# Altium PCB TimeHAT.PcbDoc (part 1 of 3)
Units mil, origin at the board's own origin, x right, y up, seen from the top; angles counter-clockwise.
Board outline 2559.54 x 2225.8 mil, 4 copper layers (L01-TOP, L02-GND, L03-GND, L04-BOT), stack 17.5 mil thick; 36 components, 124 nets, 365 pads, 394 vias.
Unrouted connection lines stored in the file: 194.
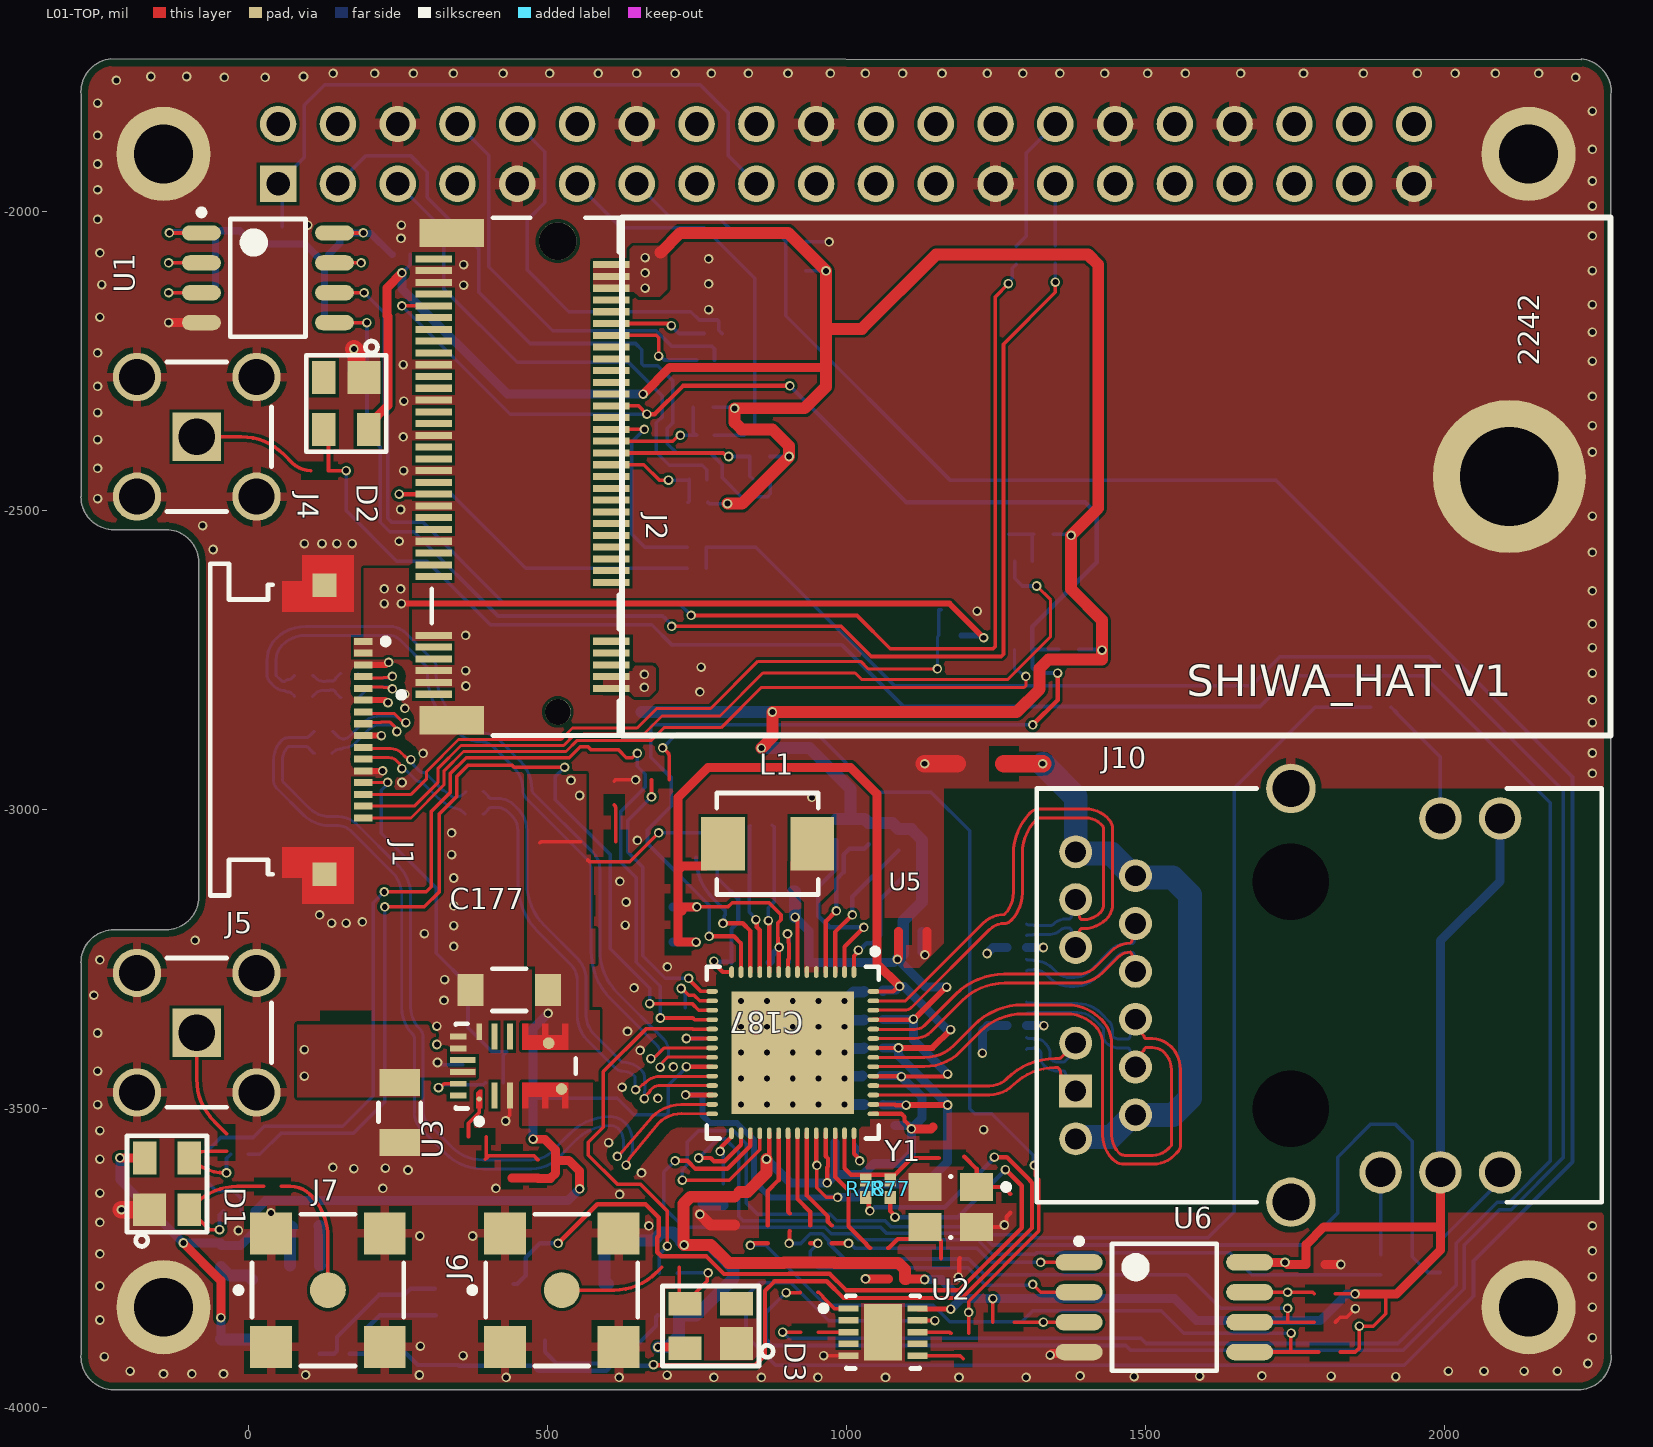
[diagram p0: L01-TOP view]
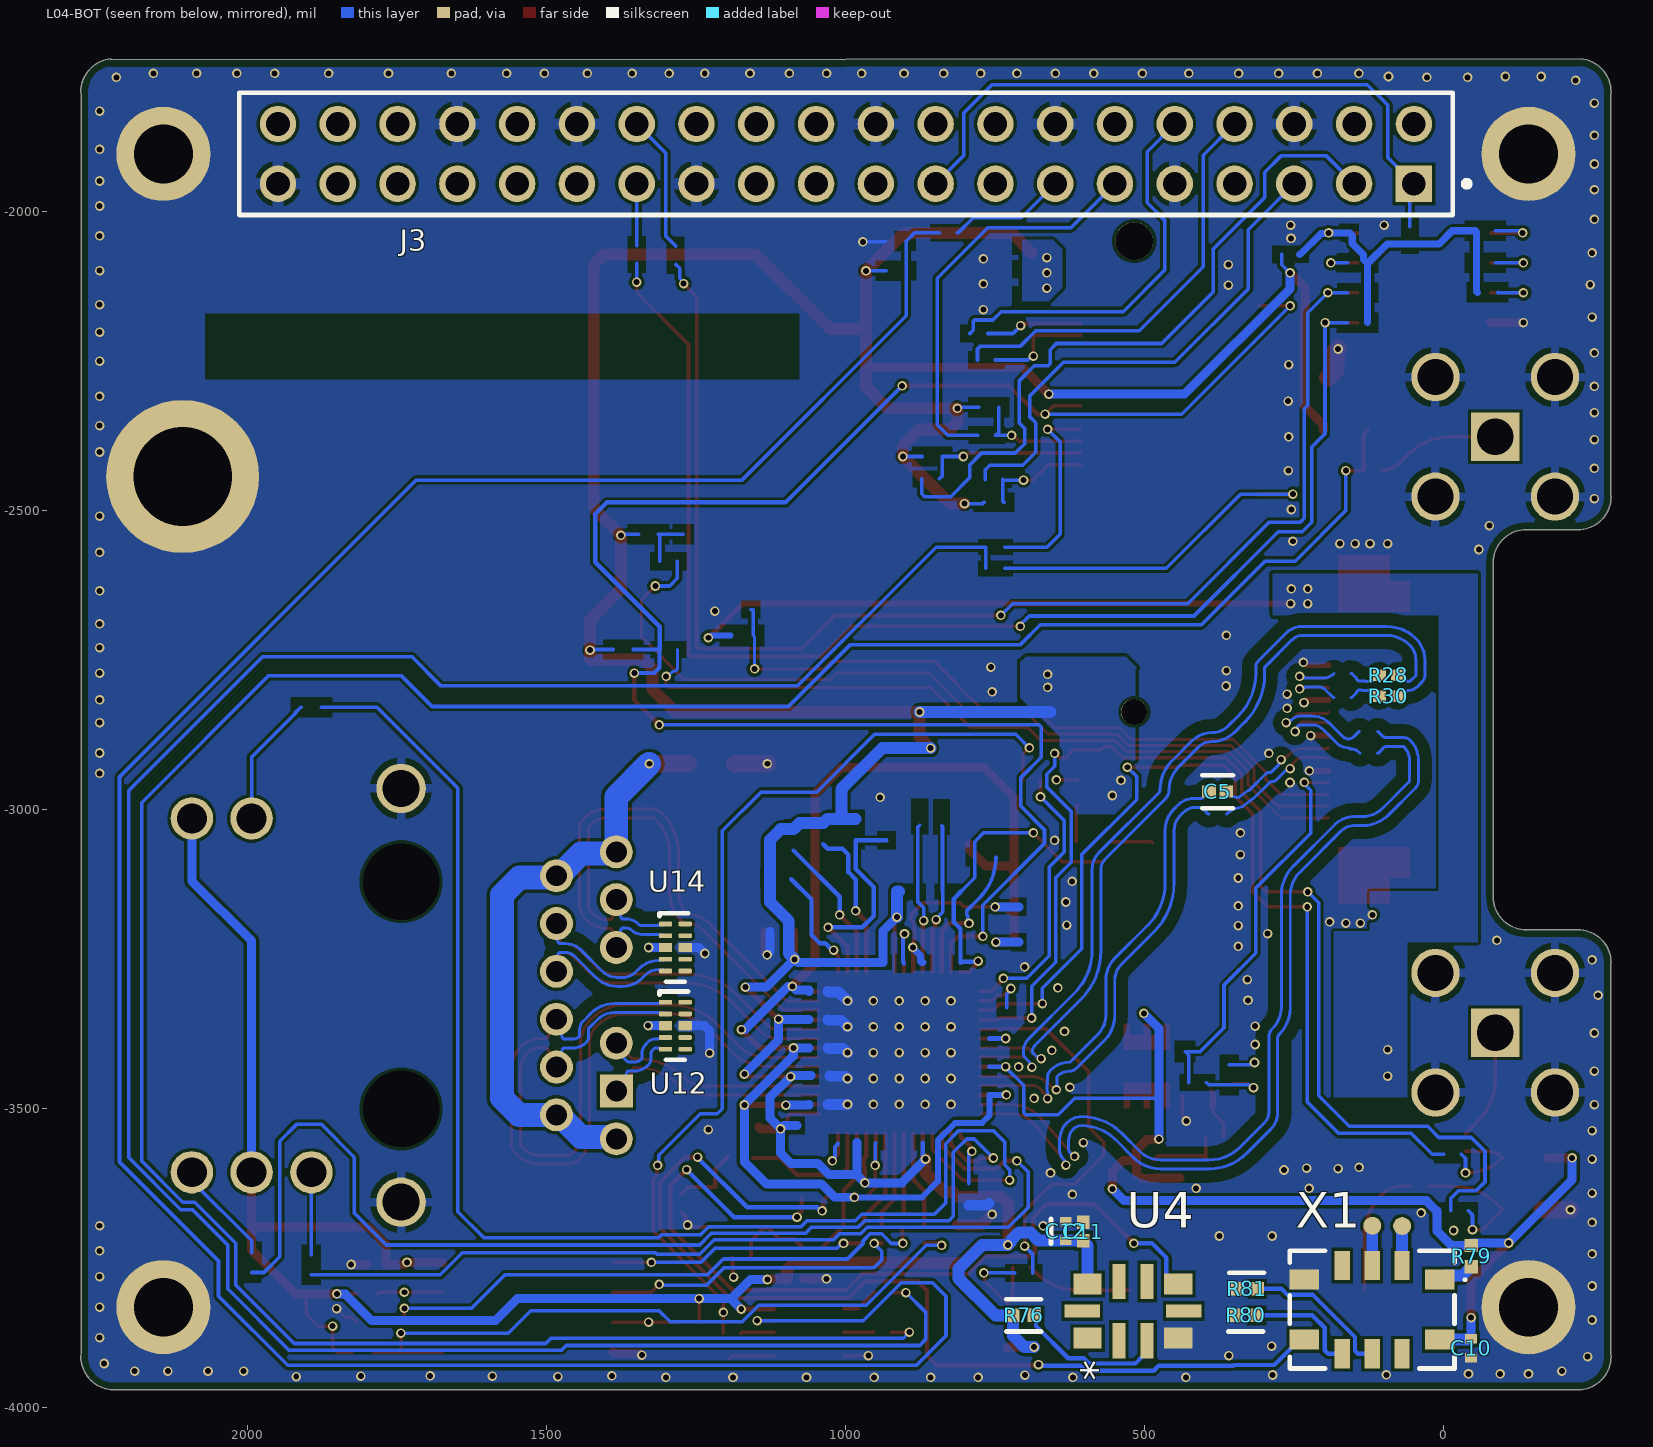
[diagram p1: L04-BOT view, seen from below]
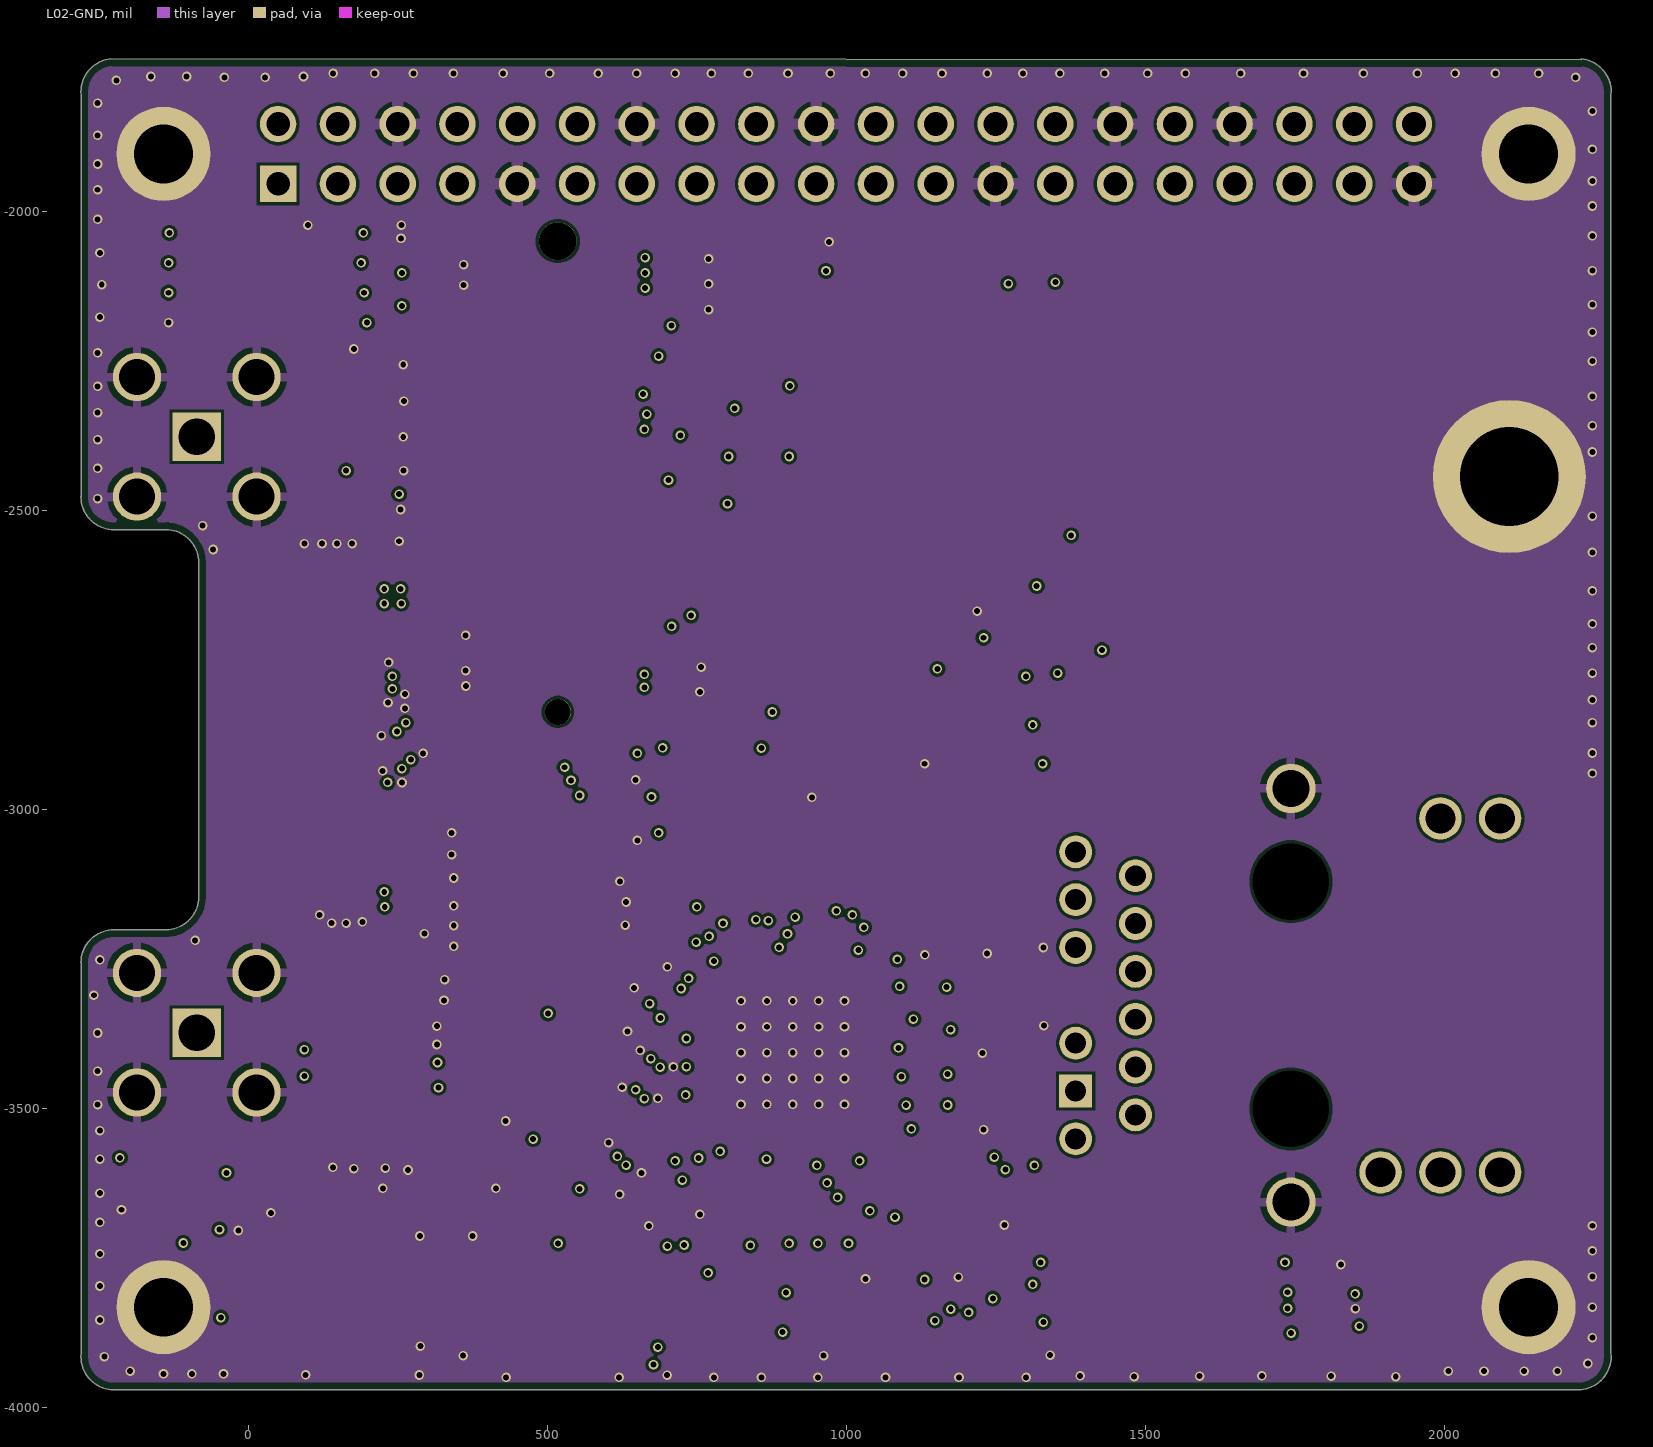
[diagram p2: L02-GND]
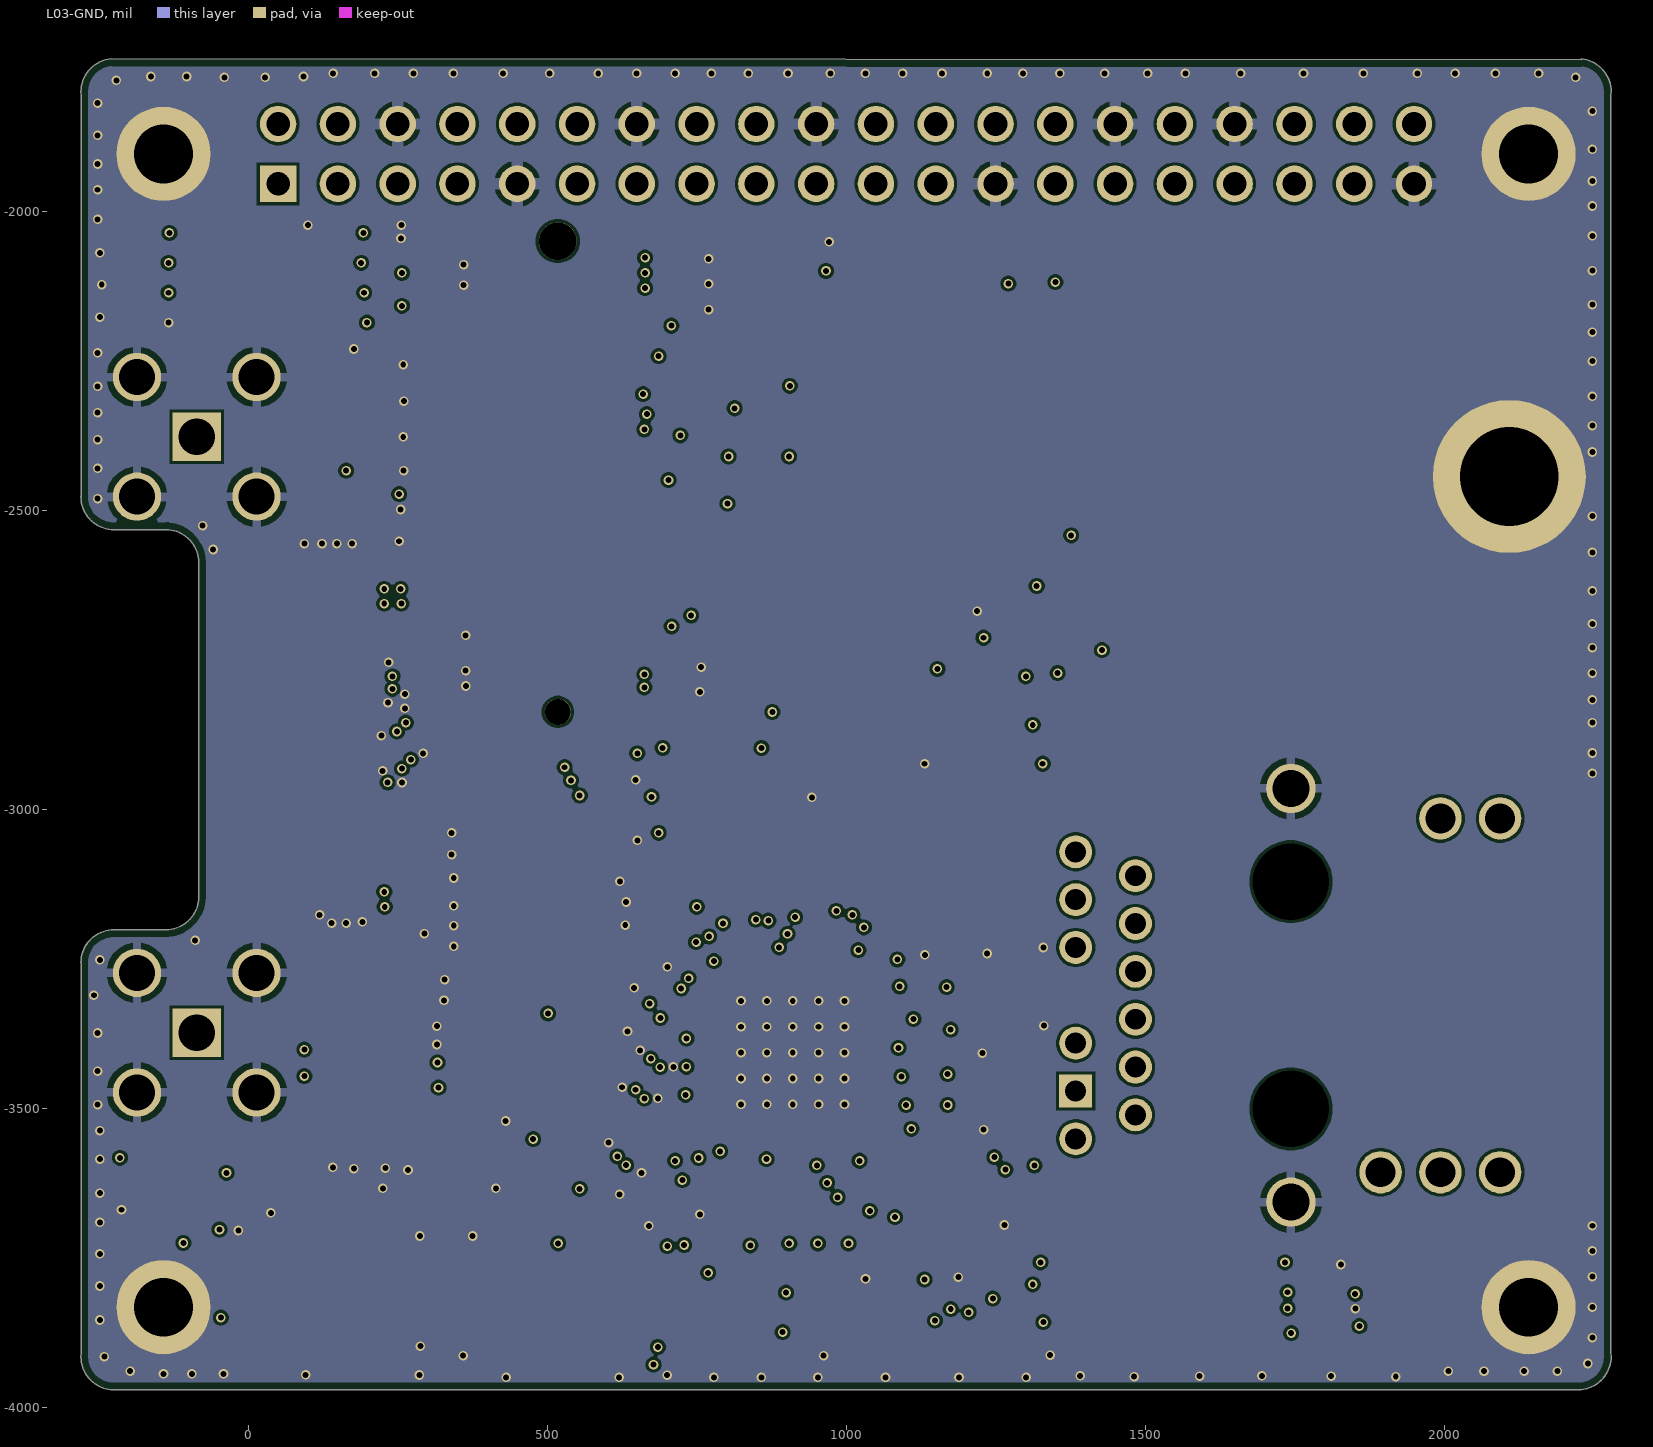
[diagram p3: L03-GND]
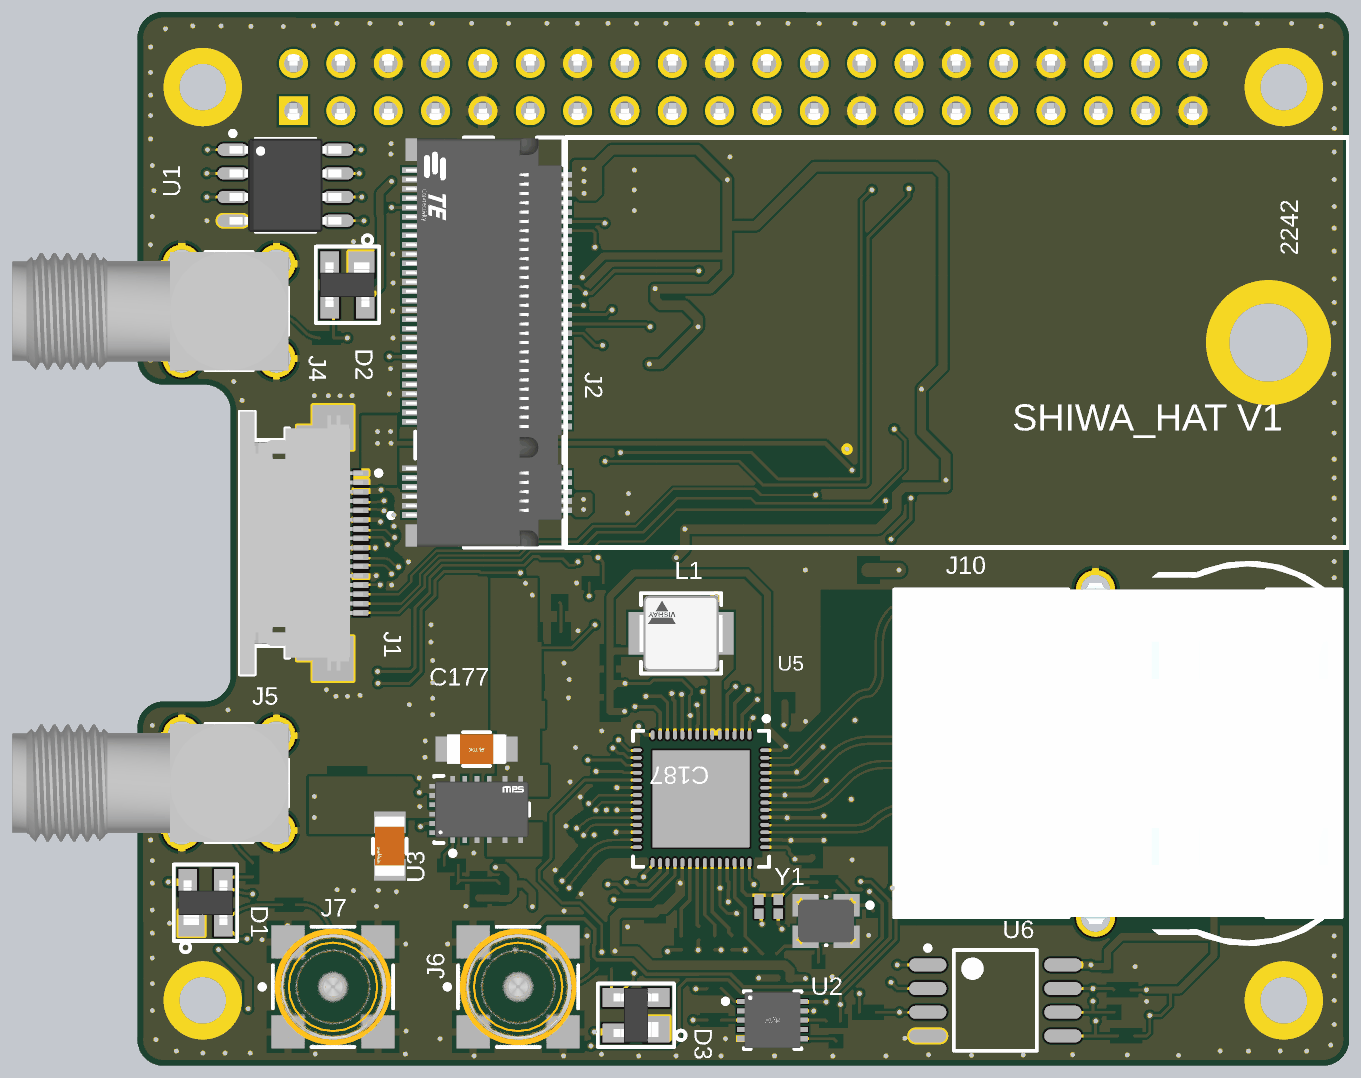
[diagram p5: 3D render of the assembled board from above, using the file's embedded part models]
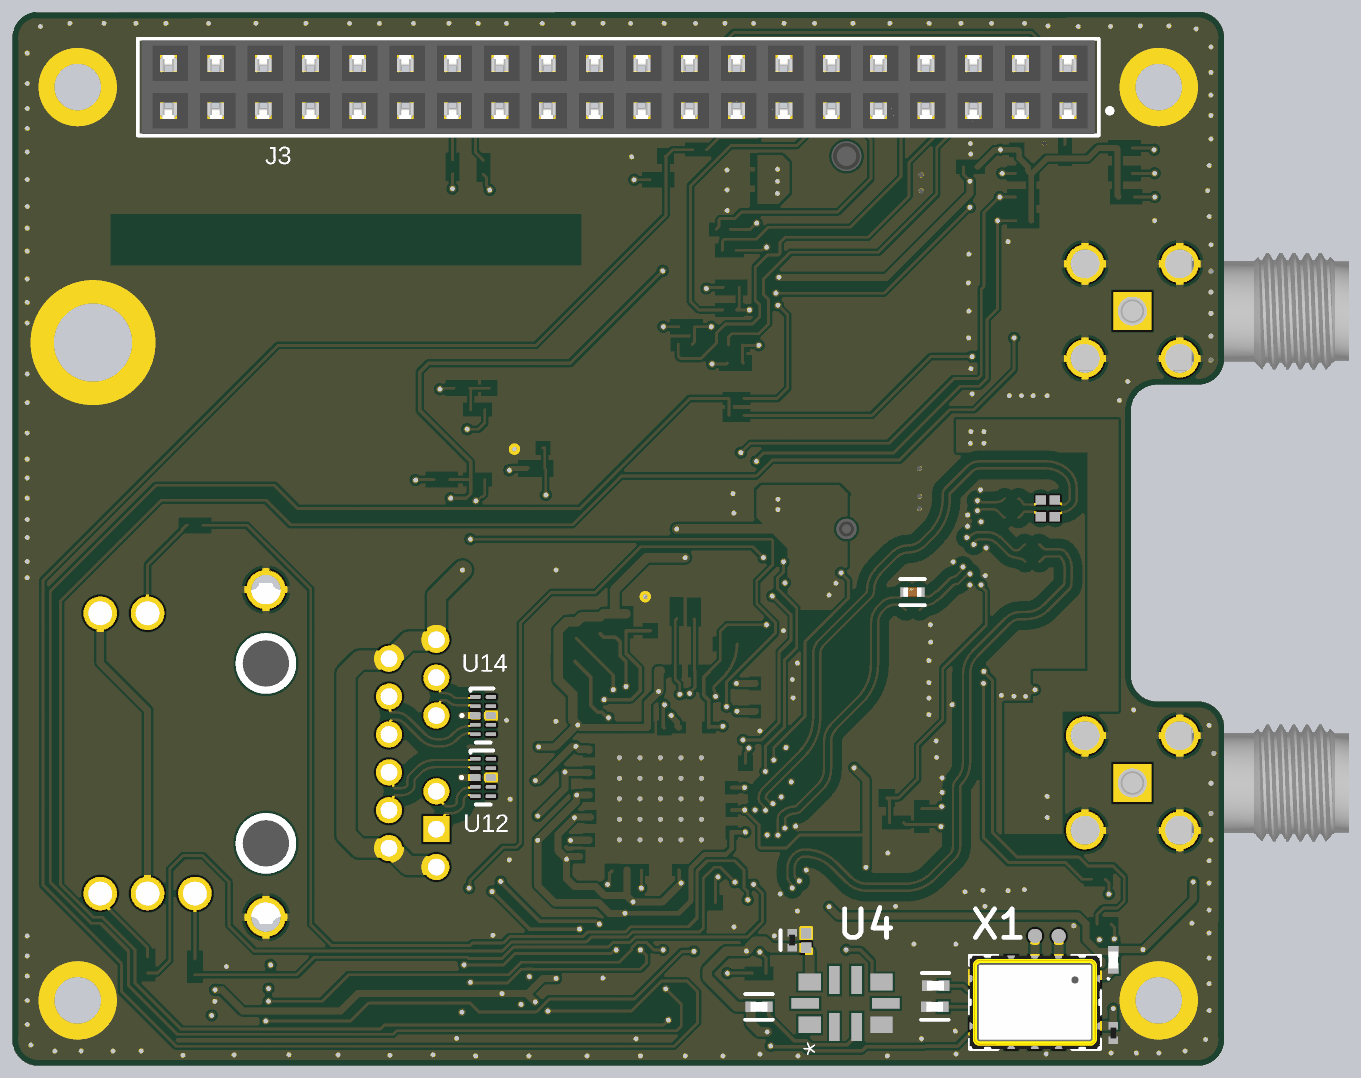
[diagram p6: 3D render of the assembled board from below, using the file's embedded part models]

## Layer stack, top to bottom
Top Solder: solder mask 0.4, Solder Resist, Dk 3.5
L01-TOP: signal copper 0.6
Dielectric 1: prepreg 3.9, FR-4, Dk 4.29
L02-GND: signal copper 0.6
Dielectric3: prepreg 7.3, FR-4, Dk 4.29
L03-GND: signal copper 0.6
Dielectric 3: prepreg 3.9, FR-4, Dk 4.29
L04-BOT: signal copper 0.6
Board Layer Stack Bottom Solder: solder mask 0.4, Solder Resist, Dk 3.5

## Board outline
-230.43,-3969.9 cw(c-225.43,-3914.9) -280.43,-3909.9 -280.43,-3256.01 -280.76,-3256.01 cw(c-225.53,-3256.01) -225.53,-3200.79 -138.81,-3200.79 ccw(c-138.81,-3145.56) -83.58,-3145.56 -83.58,-2590.55 -83.58,-2586.72 ccw(c-138.81,-2586.72) -138.81,-2531.5 -225.53,-2531.5 cw(c-225.53,-2476.27) -280.76,-2476.27 -280.43,-2476.27 -280.43,-1804.09 cw(c-225.43,-1799.1) -230.43,-1744.09 2228.62,-1745.5 2228.75,-1744.11 cw(c2223.62,-1799.09) 2278.62,-1804.09 2278.62,-3909.9 cw(c2223.62,-3914.9) 2228.62,-3969.9

## Design rules (kind name [scope] priority, off if disabled: settings)
BoardOutlineClearance [All] p1: gap=12 ignorepadtopadclearanceinfootprint=FALSE
Clearance Clearance_12V [InNet('+12V') OR InNet('+12V_PCIE')] p1: gap=10 ignorepadtopadclearanceinfootprint=TRUE
Clearance DiffPairClearance [(InDifferentialPairClass('All Differential Pairs'))] p2: gap=5 ignorepadtopadclearanceinfootprint=TRUE except(20: Arc-Fill Arc-Poly Arc-Region Track-Fill Track-Poly Track-Region)
Clearance Clearance_PCIE [InDifferentialPairClass('PCIE')] p3: gap=5 ignorepadtopadclearanceinfootprint=FALSE
Clearance [All] p4: gap=5 ignorepadtopadclearanceinfootprint=TRUE
ComponentClearance [All] p1: gap=10 collisioncheckmode=3 verticalgap=2 showdistances=FALSE
DiffPairsRouting DiffPair_100ohm [InDifferentialPairClass('All Differential Pairs')] p1: maxlimit=10 minlimit=5 mostfreqgap=10 toplayer_mingap=10 toplayer_minwidth=5 toplayer_maxwidth=5 toplayer_prefwidth=5 bottomlayer_mingap=10 bottomlayer_minwidth=5 bottomlayer_maxwidth=5 bottomlayer_prefwidth=5 impedanceprofiledriven=TRUE impedanceprofileid={54E60DE2-01EA-496C-94D2-6AE08175C5F2} impedanceprofilevalue=100.000000 maxuncoupledlength=500
HoleSize [All] p1: absolutevalues=TRUE maxlimit=1000 minlimit=8 maxpercent=80.000 minpercent=20.000
MatchedLengths SFP_TX_RX [InNetClass('SFP_TX_RX')] p1: tolerance=3 checknetsindiffpair=FALSE checkdiffpairvsdiffpair=TRUE checkxsignals=TRUE checkothers=TRUE
MatchedLengths SMA_Length1 [InNetClass('SMA_Length1')] p2: tolerance=3 checknetsindiffpair=FALSE checkdiffpairvsdiffpair=TRUE checkxsignals=TRUE checkothers=TRUE
MatchedLengths SMA_Length2 [InNetClass('SMA_Length2')] p3: tolerance=3 checknetsindiffpair=FALSE checkdiffpairvsdiffpair=TRUE checkxsignals=TRUE checkothers=TRUE
MatchedLengths SMA_Short [InNetClass('SMA_Short')] p4: tolerance=3 checknetsindiffpair=FALSE checkdiffpairvsdiffpair=TRUE checkxsignals=TRUE checkothers=TRUE
MatchedLengths Loopbacks_TX [InNetClass('Loopbacks_TX')] p5: tolerance=3 checknetsindiffpair=FALSE checkdiffpairvsdiffpair=TRUE checkxsignals=TRUE checkothers=TRUE
MatchedLengths Loopbacks_RX [InNetClass('Loopbacks_RX')] p6: tolerance=3 checknetsindiffpair=FALSE checkdiffpairvsdiffpair=TRUE checkxsignals=TRUE checkothers=TRUE
MatchedLengths DPLL_SFP_TX_RX [InNetClass('DPLL_SFP_TX_RX')] p7: tolerance=3 checknetsindiffpair=FALSE checkdiffpairvsdiffpair=TRUE checkxsignals=TRUE checkothers=TRUE
MatchedLengths DPLL_SMA [InNetClass('DPLL_SMA')] p8: tolerance=3 checknetsindiffpair=FALSE checkdiffpairvsdiffpair=TRUE checkxsignals=TRUE checkothers=TRUE
MinimumSolderMaskSliver [All] p1 off: minsoldermaskwidth=1
PolygonConnect ATX_12V [InComponent('J3')] p1: connectstyle=Relief reliefconductorwidth=20 reliefentries=4 polygonreliefangle="90 Angle" airgapwidth=8
PolygonConnect SMA_GND_1 [(InComponent('J5') OR InComponent('J7') OR InComponent('J4') OR    InComponent('J13') OR InComponent('J6') OR InComponent('J10'))] p2: connectstyle=Relief reliefconductorwidth=15 reliefentries=4 polygonreliefangle="90 Angle" airgapwidth=10
PolygonConnect [All] p3: connectstyle=Direct reliefconductorwidth=10 reliefentries=4 polygonreliefangle="90 Angle" airgapwidth=8
RoutingVias [All] p1: holewidth=10 width=16 viastyle="Through Hole" minholewidth=8 minwidth=16 maxholewidth=28 maxwidth=50
SilkToSolderMaskClearance [IsPad] p1 off: minsilkscreentomaskgap=10 clearancetoexposedcopper=TRUE
SolderMaskExpansion [All] p1: expansion=4 istentingtop=FALSE
Width [All] p1: maxlimit=80 minlimit=3 preferedwidth=8 toplayer_minwidth=4 toplayer_maxwidth=40 toplayer_prefwidth=6 bottomlayer_minwidth=4 bottomlayer_maxwidth=40 bottomlayer_prefwidth=6 impedanceprofiledriven=TRUE impedanceprofileid={01EEFB83-325C-4167-8E9D-E60E7E24A12D} impedanceprofilevalue=50.000000 minimp=50.000000 maximp=50.000000 favimp=50.000000
25 further rules are at their usual default settings.

## Classes and differential pairs
component class 15-M2_GNSS: J2 U2
component class 09-I225-2: J10 U12 U14
component class 08-I225-1: C10 C11 C12 L1 R28 R30 R76 R77 R78 R79 R80 R81 U4 U5 U6 X1 Y1
component class 13-Power-P3V3: C177 C187 U3
component class 01-PCIe_40pin: C5 J1 J3 U1
component class 02-USER_IO: D1 D2 D3 J4 J5 J6 J7
differential pair MDI_D: +MDI_D_P -MDI_D_N
differential pair MDI_C: +MDI_C_P -MDI_C_N
differential pair MDI_B: +MDI_B_P -MDI_B_N
differential pair MDI_A: +MDI_A_P -MDI_A_N
differential pair I225_PE_RX: +I225_PE_RX_P -I225_PE_RX_N
differential pair PCIE_I225_GF_C_0: +PCIE_I225_GF_C_0_P -PCIE_I225_GF_C_0_N
differential pair PCIE_CLK_C: +PCIE_CLK_C_P -PCIE_CLK_C_N
differential pair PCIE_CLK: +PCIE_CLK_P -PCIE_CLK_N
differential pair PCIE_I225_GF_0: +PCIE_I225_GF_0_P -PCIE_I225_GF_0_N
differential pair PCIE_GF_I225_0: +PCIE_GF_I225_0_P -PCIE_GF_I225_0_N
differential pair PCIE_CLK_R: +PCIE_CLK_R_P -PCIE_CLK_R_N

## Components (designator, comment, footprint, x,y, rotation, side; value= is the part's Value field where it differs from the comment)
C5 "0.1uF_25V_0402" FP-0402-L_1_0_1-W_0_5_0_1-IPC_C 377.47,-2969.72 r0 bottom
C10 "0.1uF_16V_0402" FP-GRM15-MFG -46.61,-3900.94 r270 bottom value=0.10μF
C11 "22pF_10V_0402" CAPC1005X56X25LL10T15 601.99,-3705.65 r270 bottom
C12 "0.1uF_16V_0402" FP-GRM15-MFG 631.56,-3704.86 r90 bottom value=0.10μF
C177 "47uF_16V_1206" FP-C3216-160-0_2-MFG 435.76,-3301.38 r180 top
C187 "4.7uF_50V_1206" FP-GRM31C-0_2-e0_3_0_8-IPC_C 252.46,-3506.37 r270 top
D1 "8240136" SOT143-4L -136.72,-3625.8 r90 top
D2 "8240136" SOT143-4L 162.98,-2320.59 r270 top
D3 "8240136" SOT143-4L 772.64,-3863.54 r180 top
J1 "52746-1671" MOLX-52746-1671 159.1,-2866.01 r270 top
J2 "2199119-3" FP-2199119-3-MFG 462.8,-2442.64 r90 top locked
J3 "M20-7832046" FP-M20-7832046-MFG 999.09,-1902.97 r0 bottom locked
J4 "731000114" MOLX-731000114_V -86.96,-2376.21 r0 top
J5 "731000114" MOLX-731000114_V -86.96,-3372.89 r0 top
J6 "73251-1350" FP-73251-1350-MFG 523.62,-3803.54 r0 top
J7 "73251-1350" FP-73251-1350-MFG 132.47,-3803.54 r0 top
J10 "L829-1J1T-43" BELS-L829-1J1T-43_V 1743.25,-3310.42 r270 top
L1 "1uH_4.5A_27mOhm" FP-IHLP-1616BZ-FP_1_8545x-MFG 867.78,-3056.92 r180 top
R28 "0_5%_0402" RESC1005X40X25LL10T10 91.59,-2775.12 r180 bottom
R30 "0_5%_0402" RESC1005X40X25LL10T10 91.59,-2810.19 r180 bottom
R76 "CRCW040210K0JNED" FP-CRCW0402-e3-IPC_B 701.77,-3845.83 r0 bottom
R77 "0_5%_0402" RESC1005X40X25LL10T10 1072.97,-3634.17 r90 top
R78 "0_5%_0402" RESC1005X40X25LL10T10 1032.24,-3634.17 r90 top
R79 "CRCW040210K0JNED" FP-CRCW0402-e3-IPC_B -46.61,-3746.69 r270 bottom
R80 "CRCW040210K0JNED" FP-CRCW0402-e3-IPC_B 330.36,-3845.83 r180 bottom
R81 "CRCW040210K0JNED" FP-CRCW0402-e3-IPC_B 328.83,-3801.32 r180 bottom
U1 "CAT24C32WI-GT3" ONSC-SOIC-8-751BD-01_M 32.08,-2110.24 r0 top
U2 "NX3DV221TK" FP-SOT650-2-MFG 1060.9,-3873.76 r0 top
U3 "MPM3630GQV-P" FP-MPM3630GQV-P-MFG 446.51,-3428.78 r90 top locked
U4 "TG5032CGN 40.0000M-CAGHNA0" "QFN10_TG5032CGN 40.0000M-CAGHNA0_EPS" 519.01,-3838.54 r90 bottom
U5 "I225" "I225 QFN56" 909.93,-3406.3 r270 top
U6 "SST25VF016B-50-4C-S2AF" MCHP-SOIC-S2A8_M 1531.54,-3832.1 r0 top
U12 "TPD4EUSB30DQAR" DQA0010A_V 1284.41,-3361.28 r180 bottom
U14 "TPD4EUSB30DQAR" DQA0010A_V 1284.41,-3230.42 r180 bottom
X1 "SIT5501AI-WUG33JT-10.000000" XTAL_SiT5501_70x50 118.96,-3836.16 r270 bottom
Y1 "ABM8G-25.000MHZ-18-D2Y-T" FP-ABM8G-MFG 1174.19,-3664.51 r180 top

## Footprints (in the part's own frame and the unit in brackets; to place one, negate y for a bottom-side part, rotate by r counter-clockwise, add the part's x,y. Pads: shape width x height; smd on the part's side, far side on the other; paste and mask are expansions set on the pad)
BELS-L829-1J1T-43_V [mm] "THD, 19-Leads, Body 23.94x17.58mm, Pitch 2.03mm"
  rect 1.4x1.4 hole 0.89: 1(4.064,-9.144)
  round 1.4 hole 0.89: 2(6.096,-9.144) 3(2.032,-9.144) 4(1.016,-6.604) 5(5.08,-6.604) 6(3.048,-6.604) 7(-1.016,-6.604) 8(-5.08,-6.604) 9(-3.048,-6.604) 10(-4.064,-9.144) 11(-6.096,-9.144) 12(-2.032,-9.144)
  round 1.8 hole 1.27: 13(-7.518,6.35) 14(-7.518,8.89) 15(7.518,3.81) 16(7.518,6.35) 17(7.518,8.89)
  round 2.95 hole 3.25 unplated: MH1(-4.826,0) MH2(4.826,0)
  round 2.1 hole 1.57: S1(-8.788,0) S2(8.788,0)
  silkscreen extent -8.79,-10.8 8.79,13.2, body extent -10.35,-10.8 10.35,13.2, height 12.74
CAPC1005X56X25LL10T15 [mm] "Chip Capacitor, 2-Leads, Body 1.00x0.50mm, IPC High Density"
  rect 0.58x0.54 smd: 1(-0.39,0) 2(0.39,0)
  body extent -0.55,-0.3 0.55,0.3, height 0.56
DQA0010A_V [mm] "SON, 10-Leads, Body 1x2.5mm, Pitch 0.5mm, TI Recommended"
  rrect50% 0.565x0.2 smd: 1(-0.417,1) 2(-0.417,0.5) 4(-0.417,-0.5) 5(-0.417,-1) 6(0.417,-1) 7(0.417,-0.5) 9(0.417,0.5) 10(0.417,1)
  rrect28% 0.565x0.36 on Bottom Paste: 3(-0.417,0) 8(0.417,0)
  rrect25% 0.565x0.4 smd paste-0.2: 3(-0.417,0) 8(0.417,0)
  silkscreen extent -0.67,-1.45 0.55,1.45, body extent -0.55,-1.3 0.55,1.3, height 0.56
FP-0402-L_1_0_1-W_0_5_0_1-IPC_C [mil]
  rect 22.88x20.16 smd paste+0 mask+0: 1(-14.39,0) 2(14.39,0)
  silkscreen extent -26,-28 26,28, body extent -20,-10 20,10, height 22
FP-73251-1350-MFG [mil]
  round 60 smd paste+0 mask+0: 1(0,0)
  rect 70x70 smd paste+0 mask+0: 2(-95,95) 3(95,95) 4(-95,-95) 5(95,-95)
  silkscreen extent -155,-127 127,127, body extent -134,-134 134,134, height 10
FP-2199119-3-MFG [mm]
  rect 0.3x1.55 smd paste+0 mask+0: 1(-9.25,3.9) 2(-9,-3.65) 3(-8.75,3.9) 4(-8.5,-3.65) 5(-8.25,3.9) 6(-8,-3.65) 7(-7.75,3.9) 8(-7.5,-3.65) 9(-7.25,3.9) 10(-7,-3.65) 11(-6.75,3.9) 20(-4.5,-3.65) 21(-4.25,3.9) 22(-4,-3.65) 23(-3.75,3.9) 24(-3.5,-3.65) 25(-3.25,3.9) 26(-3,-3.65) 27(-2.75,3.9) 28(-2.5,-3.65) 29(-2.25,3.9) 30(-2,-3.65) 31(-1.75,3.9) 32(-1.5,-3.65) 33(-1.25,3.9) 34(-1,-3.65) 35(-0.75,3.9) 36(-0.5,-3.65) 37(-0.25,3.9) 38(0,-3.65) 39(0.25,3.9) 40(0.5,-3.65) 41(0.75,3.9) 42(1,-3.65) 43(1.25,3.9) 44(1.5,-3.65) 45(1.75,3.9) 46(2,-3.65) 47(2.25,3.9) 48(2.5,-3.65) 49(2.75,3.9) 50(3,-3.65) 51(3.25,3.9) 52(3.5,-3.65) 53(3.75,3.9) 54(4,-3.65) 55(4.25,3.9) 56(4.5,-3.65) 57(4.75,3.9) 58(5,-3.65) 59(5.25,3.9) 60(5.5,-3.65) 61(5.75,3.9) 62(6,-3.65) 63(6.25,3.9) 64(6.5,-3.65) 65(6.75,3.9) 66(7,-3.65) 67(7.25,3.9) 68(7.5,-3.65) 69(7.75,3.9) 70(8,-3.65) 71(8.25,3.9) 72(8.5,-3.65) 73(8.75,3.9) 74(9,-3.65) 75(9.25,3.9)
  rect 1.2x2.75 smd paste+0 mask+0: 76(-10.35,3.125) 77(10.35,3.125)
  round 1.1 hole 1.1 unplated paste-2539.97 mask+0: ""(-10,-1.375)
  round 1.6 hole 1.6 unplated paste-2539.97 mask+0: ""(10,-1.375)
  silkscreen extent -11,-3.98 11,5.4, body extent -11.1,-4.52 11.1,4.77, height 0.25
FP-ABM8G-MFG [mm]
  rect 1.4x1.2 smd paste+0 mask+0: 1(-1.1,-0.85) 2(1.1,-0.85) 3(1.1,0.85) 4(-1.1,0.85)
  silkscreen extent -2.47,-1.3 0.03,1.3, body extent -1.9,-1.55 1.9,1.55, height 0.25
FP-C3216-160-0_2-MFG [mm]
  rect 1.1x1.35 smd paste+0 mask+0: 1(-1.65,0) 2(1.65,0)
  silkscreen extent -0.72,-0.9 0.72,0.9, body extent -2.3,-1 2.3,1, height 0.25
FP-CRCW0402-e3-IPC_B [mil]
  rect 22.37x22.54 smd paste+0 mask+0: 1(-17.8,0) 2(17.8,0)
  silkscreen extent -29,-27 29,27, body extent -20,-10 20,10, height 16
FP-GRM15-MFG [mm]
  rect 0.4x0.5 smd paste+0 mask+0: 1(-0.4,0) 2(0.4,0)
  body extent -0.3,-0.16 0.3,0.16, height 0.33
FP-GRM31C-0_2-e0_3_0_8-IPC_C [mil]
  rect 45.46x67.17 smd paste+0 mask+0: 1(-50.23,0) 2(50.23,0)
  silkscreen extent -16,-35 16,35, body extent -77,-39 77,39, height 10
FP-IHLP-1616BZ-FP_1_8545x-MFG [mil]
  rect 73.01x90 smd paste+0 mask+0: 1(-74.5,0) 2(74.5,0)
  silkscreen extent -85,-85 85,85, body extent -115,-89 115,89, height 10
FP-M20-7832046-MFG [mm]
  rect 1.55x1.55 hole 1 paste-2539.97 mask+0: 1(-24.13,1.27)
  round 1.55 hole 1 paste-2539.97 mask+0: 2(-24.13,-1.27) 3(-21.59,1.27) 4(-21.59,-1.27) 5(-19.05,1.27) 6(-19.05,-1.27) 7(-16.51,1.27) 8(-16.51,-1.27) 9(-13.97,1.27) 10(-13.97,-1.27) 11(-11.43,1.27) 12(-11.43,-1.27) 13(-8.89,1.27) 14(-8.89,-1.27) 15(-6.35,1.27) 16(-6.35,-1.27) 17(-3.81,1.27) 18(-3.81,-1.27) 19(-1.27,1.27) 20(-1.27,-1.27) 21(1.27,1.27) 22(1.27,-1.27) 23(3.81,1.27) 24(3.81,-1.27) 25(6.35,1.27) 26(6.35,-1.27) 27(8.89,1.27) 28(8.89,-1.27) 29(11.43,1.27) 30(11.43,-1.27) 31(13.97,1.27) 32(13.97,-1.27) 33(16.51,1.27) 34(16.51,-1.27) 35(19.05,1.27) 36(19.05,-1.27) 37(21.59,1.27) 38(21.59,-1.27) 39(24.13,1.27) 40(24.13,-1.27)
  silkscreen extent -26.5,-2.6 25.78,2.6, body extent -25.6,-2.52 25.6,2.52, height 8.61
FP-MPM3630GQV-P-MFG [mm]
  round 0.225 smd paste+0 mask+0: 1(-1.4,1.55)
  rect 1.1x0.25 smd paste+0 mask+0: 2(-1.25,0.9) 3(-1.25,0.25) 10(1.25,0.25) 11(1.25,0.9)
  round 0.495 smd paste+0 mask+0: 4-5-6(-0.975,-1.95) 7-8-9(0.975,-1.4)
  rect 0.7x0.25 smd paste+0 mask+0: 12(1.45,1.55)
  rect 0.25x0.7 smd paste+0 mask+0: 13(1.25,2.45) 14(0.75,2.45) 17(-0.75,2.45) 18(-1.25,2.45)
  rect 0.25x1.1 smd paste+0 mask+0: 15(0.25,2.25) 16(-0.25,2.25)
  L01-TOP region: -1.8,1.425 -1.8,1.675 -1.125,1.675 -1,1.55 -1,1.425
  L01-TOP region: -1.8,-0.275 -0.7,-0.275 -0.7,-2.225 -1.8,-2.225 -1.8,-1.975 -1.3,-1.975 -1.3,-1.375 -1.8,-1.375 -1.8,-1.125 -1.3,-1.125 -1.3,-0.525 -1.8,-0.525
  L01-TOP region: 1.8,-0.275 0.7,-0.275 0.7,-2.225 1.8,-2.225 1.8,-1.975 1.3,-1.975 1.3,-1.375 1.8,-1.375 1.8,-1.125 1.3,-1.125 1.3,-0.525 1.8,-0.525
  silkscreen extent -2.47,-2.55 1.8,2.55, body extent -1.9,-2.65 1.9,2.9, height 0.25
FP-SOT650-2-MFG [mm]
  rect 0.85x0.27 smd paste+0 mask-1000: 1(-1.475,1) 2(-1.475,0.5) 3(-1.475,0) 4(-1.475,-0.5) 5(-1.475,-1) 6(1.475,-1) 7(1.475,-0.5) 8(1.475,0) 9(1.475,0.5) 10(1.475,1)
  rect 1.6x2.4 smd paste-1000 mask-1000: 11(0,0)
  silkscreen extent -2.65,-1.55 1.55,1.55, body extent -2,-1.73 2,1.73, height 0.25
"I225 QFN56" [mm]
  oval 0.5x0.2 smd: 1(-3.425,2.6) 2(-3.425,2.2) 3(-3.425,1.8) 4(-3.425,1.4) 5(-3.425,1) 6(-3.425,0.6) 7(-3.425,0.2) 8(-3.425,-0.2) 9(-3.425,-0.6) 10(-3.425,-1) 11(-3.425,-1.4) 12(-3.425,-1.8) 13(-3.425,-2.2) 14(-3.425,-2.6) 29(3.425,-2.6) 30(3.425,-2.2) 31(3.425,-1.8) 32(3.425,-1.4) 33(3.425,-1) 34(3.425,-0.6) 35(3.425,-0.2) 36(3.425,0.2) 37(3.425,0.6) 38(3.425,1) 39(3.425,1.4) 40(3.425,1.8) 41(3.425,2.2) 42(3.425,2.6)
  oval 0.2x0.5 smd: 15(-2.6,-3.425) 16(-2.2,-3.425) 17(-1.8,-3.425) 18(-1.4,-3.425) 19(-1,-3.425) 20(-0.6,-3.425) 21(-0.2,-3.425) 22(0.2,-3.425) 23(0.6,-3.425) 24(1,-3.425) 25(1.4,-3.425) 26(1.8,-3.425) 27(2.2,-3.425) 28(2.6,-3.425) 43(2.6,3.425) 44(2.2,3.425) 45(1.8,3.425) 46(1.4,3.425) 47(1,3.425) 48(0.6,3.425) 49(0.2,3.425) 50(-0.2,3.425) 51(-0.6,3.425) 52(-1,3.425) 53(-1.4,3.425) 54(-1.8,3.425) 55(-2.2,3.425) 56(-2.6,3.425)
  rect 5.2x5.2 smd: PAD(0,0)
  silkscreen extent -4.42,-3.65 3.65,3.65, body extent -3.5,-3.5 3.5,3.5, height 0.9
MCHP-SOIC-S2A8_M [mm] "SOIC, 8-Leads, Body 5.275x5.275mm, Pitch 1.27mm, IPC Low Density"
  oval 2x0.7 smd: 1(-3.625,1.905) 2(-3.625,0.635) 3(-3.625,-0.635) 4(-3.625,-1.905) 5(3.625,-1.905) 6(3.625,-0.635) 7(3.625,0.635) 8(3.625,1.905)
  silkscreen extent -3.75,-2.7 2.23,2.93, body extent -2.7,-2.7 2.7,2.7, height 2.16
MOLX-52746-1671 [mm] "FPC Connector, 16-Leads, Right Angle, Pitch 0.5 mm, Mated Height 2.0 mm, SMT"
  rect 0.3x0.8 smd: 1(-3.75,0.824) 2(-3.25,0.824) 3(-2.75,0.824) 4(-2.25,0.824) 5(-1.75,0.824) 6(-1.25,0.824) 7(-0.75,0.824) 8(-0.25,0.824) 9(0.25,0.824) 10(0.75,0.824) 11(1.25,0.824) 12(1.75,0.824) 13(2.25,0.824) 14(2.75,0.824) 15(3.25,0.824) 16(3.75,0.824)
  rect 1x1 smd: MP1(-6.134,-0.824) MP2(6.134,-0.824)
  L01-TOP region: 5,0.424 7.4,0.424 7.4,-1.776 7.4,-1.777 6.3,-1.777 6.3,-2.626 5,-2.626 5,0.424
  L01-TOP region: -7.4,0.424 -5,0.424 -5,-2.626 -5,-2.626 -6.3,-2.626 -6.3,-1.777 -6.3,-1.776 -7.4,-1.776
  silkscreen extent -7.05,-5.68 7.05,1.9, body extent -7.05,-5.68 7.05,0.92, height 2.01
MOLX-731000114_V [mm] "Connector, 5-Leads, Body 14.8x6.35mm, Pitch 2.54mm"
  rect 2.05x2.05 hole 1.54: 1(0,0)
  round 2.05 hole 1.54: 2(-2.54,2.54) 3(-2.54,-2.54) 4(2.54,-2.54) 5(2.54,2.54)
  silkscreen extent -1.26,-3.17 3.17,3.17, body extent -11.62,-3.17 3.18,3.18, height 9.57
ONSC-SOIC-8-751BD-01_M [mm] "SOIC, 8-Leads, Body 4.90x3.90mm, Pitch 1.27mm, IPC Low Density"
  oval 1.65x0.65 smd: 1(-2.825,1.905) 2(-2.825,0.635) 3(-2.825,-0.635) 4(-2.825,-1.905) 5(2.825,-1.905) 6(2.825,-0.635) 7(2.825,0.635) 8(2.825,1.905)
  silkscreen extent -2.95,-2.5 1.6,2.9, body extent -3,-2.5 3,2.5, height 1.75
"QFN10_TG5032CGN 40.0000M-CAGHNA0_EPS" [mil]
  rect 35x47 smd paste+0 mask+0: 1(-45.28,75.79) 4(-45.28,-75.79) 6(45.28,-75.79) 9(45.28,75.79)
  rect 59x22 smd paste+0 mask+0: 2(-49.5,23.62) 3(-49.5,-23.62) 7(49.5,-23.62) 8(49.5,23.62)
  rect 22x59 smd paste+0 mask+0: 5(0,-85) 10(0,85)
RESC1005X40X25LL10T10 [mm] "Chip Resistor, 2-Leads, Body 1.00x0.50mm, IPC High Density"
  rect 0.55x0.5 smd: 1(-0.375,0) 2(0.375,0)
  body extent -0.55,-0.3 0.55,0.3, height 0.4
SOT143-4L [mm] "SOT143-4L, 4-Leads, Body 2.95x2.4mm, Pitch 1.70/1.90mm"
  rect 1.4x1.4 smd: 1(-1.1,0.75)
  rect 1.4x1 smd: 2(-1.1,-0.95) 3(1.1,-0.95) 4(1.1,0.95)
  silkscreen extent -2.66,-1.7 2.05,1.7, body extent -1.2,-1.46 1.2,1.46, height 1.03
XTAL_SiT5501_70x50 [mm]
  rect 0.85x1.25 smd: 1(-1.27,2.875) 5(-1.27,-2.875) 6(1.27,-2.875) 10(1.27,2.875)
  rect 1.25x0.65 smd: 2(-1.875,1.27) 3(-1.875,0) 4(-1.875,-1.27) 7(1.875,-1.27) 8(1.875,0) 9(1.875,1.27)
  silkscreen extent -2.5,-3.5 2.5,4, body extent -2.5,-3.5 2.5,3.5, height 2.06

## Part data
C5: library part CMP-2008-02519-2, "General Purpose Ceramic Capacitor, 0402, 100nF, 10%, X7R, 15%, 25V", Capacitance=100nF, Case Code (Imperial)=0402, Case Code (Metric)=1005, Dielectric=X7R, Max Operating Temperature=125°C, Min Operating Temperature=-55°C, Package Quantity=1, Tolerance=10%, Voltage=25V, Case/Package=0402, Construction=Flat, Depth=0.5mm, Lead Free="Lead Free", Length=1mm, Mount="Surface Mount", Number of Pins=2, Packaging="Tape and Reel", Radiation Hardening=No, REACH SVHC="No SVHC", RoHS Compliant=Yes, Series=-, Termination=SMD/SMT, Thickness=0.022inch, Voltage Rating=25V, Voltage Rating (DC)=25V, Width=0.02inch
C10 C12: library part CMP-2100-03641-2, "CAP CER 0.1UF 16V X7R 0402", Capacitance=0.10μF, Manufacturer=Murata, Manufacturer Part Number=GRM155R71C104KA88D, Package=GRM15, Temperature="-55°C to +125°C", Temperature Characteristic=X7R, Temperature Range High=+125°C, Temperature Range Low=-55°C, Tolerance=10%, Voltage Rating=16Vdc, Category=Cap, ComponentLink2Description=Datasheet, ComponentLink2URL=https://search.murata.co.jp/Ceramy/image/img/A01X/G101/ENG/GRM155R71H471KA01-01A.pdf, Device Class L1="Passive Components", Device Class L2=Capacitors, Device Class L3="Ceramic Capacitors", Digikey Description="CAP CER 0.1UF 16V X7R 0402", Height=0.55mm, Ipc Land Pattern Name=CAPC10050X219, Lead Free=yes, Material=Ceramic, Mouser Description="0402 0.1 uF 16V ±10 % Tolerance X7R SMT Multilayer Ceramic Capacitor", Octopart=https://octopart.com/grm155r71c104ka88d-murata-196880, RoHS=TRUE, Standoff Height=0mm
C11: library part CMP-2008-02855-1, Manufacturer="AVX Interconnect / Elco", Part Number=0402ZA220JAT2A
C177: library part CMP-2000-07442-2, "Multilayer Ceramic Capacitors 47uF ±20% 16V X5R SMD 1206", Capacitance=47uF, Case Code (Imperial)=1206, Case Code (Metric)=3216, Dielectric=X5R, Dielectric Material=Ceramic, Max Operating Temperature=85°C, Min Operating Temperature=-55°C, Package Quantity=1, Tolerance=20%, Voltage Rating=16V, Case/Package=1206, Construction=Flat, Depth=1.6mm, Height=1.6mm, Lead Free="Lead Free", Length=3.2mm, Mount="Surface Mount", Packaging="Tape and Reel", Radiation Hardening=No, REACH SVHC="No SVHC", Resistor Type=Ceramic, RoHS Compliant=Yes, Series=C, Termination=SMD/SMT, Thickness=0.071inch, Voltage Rating (DC)=16V, Weight=0.000571oz, Width=0.063inch
C187: library part CMP-1037-04923-3, "Chip Multilayer Ceramic Capacitors for General Purpose, 1206, 4.7uF, X7R, 15%, 10%, 50V", Capacitance=4.7uF, Case Code (Imperial)=1206, Case Code (Metric)=3216, Dielectric=X7R, Max Operating Temperature=125°C, Min Operating Temperature=-55°C, Package Quantity=2000, Tolerance=10%, Voltage=50V, Case/Package=1206, Depth=1.6mm, Height=1.6mm, Lead Free="Lead Free", Length=3.2mm, Material=Ceramic, Mount="Surface Mount", Packaging="Tape and Reel", Radiation Hardening=No, REACH SVHC="No SVHC", Termination=SMD/SMT, Thickness=0.071inch, Voltage Rating=50V, Voltage Rating (DC)=50V, Width=0.063inch
D1 D2 D3: library part CMP-1486-00002-1, "TVS Diode WE-TVS-HS, VRWM=3.3V", Manufacturer="Wuerth Elektronik", Reverse Stand Off Voltage=3.3V, ComponentLink1Description="Manufacturer URL", ComponentLink1URL=http://www.we-online.com, ComponentLink2Description=Datasheet, ComponentLink2URL=http://katalog.we-online.de/kataloge/eisos/media/pdf/8240136.pdf, PackageReference=SOT143-4L, PartNumber=8240136
J1: library part CMP-1241-00378-1, "0.5 mm Pitch Easy-On(TM) Type FPC Connector, 2.0 mm Mated Height, Right Angle, ZIF, SMT, Bottom Contact, 16 Circuits, -20 to 85 degC, ELV and RoHS Compliant, Tape and Reel", Current (Max per Contact)=0.5A, Manufacturer=Molex, Voltage (Max)=50V, Circuits (Loaded)=16, ComponentLink1Description="Manufacturer URL", ComponentLink1URL=http://www.molex.com/molex/index.jsp, ComponentLink2Description=Datasheet, ComponentLink2URL=http://www.molex.com/webdocs/datasheets/pdf/en-us/0527461671_FFC_FPC_CONNECTORS.pdf, ComponentLink3Description="Package Specification", ComponentLink3URL=http://www.molex.com/pdm_docs/sd/527461671_sd.pdf, Contact Position=Bottom, Durability (mating cycles max)=20, Entry Angle="90degrees Angle", Mated Height=2.00mm, Material - Metal="Phosphor Bronze", Material - Plating Mating=Gold, Material - Plating Termination=Gold, Mounting Technology="Surface Mount", Number of Rows=1, Orientation="Right Angle", PackageDescription="16-Lead FPC Connector, Pitch 0.5 mm", PackageReference=52746-1671, PackageVersion="Rev. H, 05/2009", Packing="Tape and Reel", PartNumber=52746-1671, PCB Locator=No, PCB Retention=Yes, Pitch - Mating Interface=0.50mm, Polarized to PCB=Yes, RoHS=TRUE, Stackable=No
J2: library part CMP-03365-000004-1, "CONN M.2 FEMALE 67POS 0.020 GOLD", Color=Black, Contact Current Rating=500mA, Insulation Resistance=500MR, Max Operating Temperature=80°C, Max Voltage Rating (AC)=50V, Min Operating Temperature=-40°C, Package Quantity=1200, Contact Material="Copper Alloy", Contact Plating=Gold, Current Rating=500mA, ELV=Compliant, Gender=Female, Height=3.2mm, Housing Color=Black, Housing Material=Thermoplastic, Insulation Material=Thermoplastic, Length=0.862inch, Mount="Surface Mount", Number of Contacts=67, Number of Positions=67, Number of Rows=2, Orientation="Right Angle", Packaging="Tape and Reel", PCB Mounting Orientation="Right Angle", Pitch=0.5mm, Radiation Hardening=No, RoHS Compliant=Yes, Row Spacing=7.55mm, Termination=Solder, Voltage Rating=50V, Width=8.7mm
J3: library part CMP-15831-000036-1, "CONN RCPT 40POS 0.1 TIN PCB", Color=Black, Contact Resistance=20mR, Current Rating=3A, Insulation Resistance=1MR, Max Operating Temperature=105°C, Min Operating Temperature=-40°C, Package Quantity=11, Connector Type=Receptacle, Contact Gender=Female, Contact Material=Bronze, Contact Plating=Tin, Contact Type="Female Socket", Depth=5.04mm, Gender=Receptacle, Hole Diameter=0.8mm, Housing Color=Black, Housing Material=Polyamide, Lead Pitch=2.54mm, Length=51.2mm, Material=Glass, Mating Cycles=50, Max Current Rating=3A, Mount="Through Hole", Number of Contacts=40, Number of Positions=40, Number of Rows=2, Orientation=Straight, Packaging=Rail/Tube, Pitch=2.54mm, Radiation Hardening=No, REACH SVHC="No SVHC", RoHS Compliant=Yes, Row Spacing=0.1inch, Series=M20, Termination=Solder
J4 J5: library part CMP-2000-05487-1, "SMA Right-Angle PCB Jack Receptacle, Brass Body, Gold Plated, 50 Ohm, 5-Pin THD, RoHS, Tray", Manufacturer=Molex, Package Description="5-Pin Through Hole Device, Body 14.8 x 6.35 mm, Pitch 2.54 mm", Datasheet URL=http://www.molex.com/webdocs/datasheets/pdf/en-us/0731000114_RF_COAX_CONNECTORS.pdf, Datasheet Version=09/2016, Manufacturer URL=http://www.molex.com/, Mounting Technology=ThroughHole, Package Reference=731000114, Package URL=http://www.molex.com/pdm_docs/sd/731000114_sd.pdf
J6 J7: library part CMP-04764-000006-1, "CONN SMA JACK STR 50 OHM SMD", Frequency=18GHz, Manufacturer=Molex, Temperature="-65°C to +165°C", Temperature Range High=+165°C, Temperature Range Low=-65°C, Voltage Rating=500V, Automotive=No, Category=Conn, ComponentLink2Description=Datasheet, ComponentLink2URL=https://www.molex.com/pdm_docs/sd/732511350_sd.pdf, Conn Orientation=Straight, Contact Material=Gold, Device Class L1=Connectors, Device Class L2="RF / Coaxial Connectors", Device Class L3=unset, Digikey Description="CONN SMA JACK STR 50 OHM SMD", Footprint Url=https://forum.upverter.com/uploads/default/original/3X/d/a/daeafa2ce4908d4fc4e49f0b17d7d2c986fce444.pdf, Height=9.655mm, Impedance=50Ω, Is Female=yes, Lead Free=Yes, Manufacturer Part Number=73251-1350, Mouser Description="RF Connectors / Coaxial Connectors SMA ST PCB-JCK STD SMT", Number of Contacts=1, Octopart=https://octopart.com/73251-1350-molex-5414390, Package=73251-1350, RoHS=TRUE, Shielding=true, Standoff Height=0.41mm
J10: library part CMP-1715-00001-1, "Gigabit MagJack(R) Ultra Low Profile, 10/100/1000 Base-T, 19-Pin THD, RoHS, Tray", Case/Package=Metal, Package Quantity=60, ComponentLink1Description="Manufacturer URL", ComponentLink1URL=http://belfuse.com/ethernet/, ComponentLink2Description=Datasheet, ComponentLink2URL=http://belfuse.com/pdfs/L829-1J1T-43.pdf, DatasheetVersion="Rev. G", Height="11.3 mm", Length="17.78 mm", Mount="Through Hole", Mounting Technology="Through Hole", PackageDescription="19-Pin Through Hole Device, Body 23.94 x 17.58 mm, Pitch 2.03 mm", Packaging=Tray, PartNumber=L829-1J1T-43, Pins=8, RoHSCompliant=True, Width="24.13 mm"
L1: library part CMP-02424-000223-1, "Fixed Inductors Commercial Low DCR Series SMT 1uH 4.5A 27mΩ 20%", Case Code (Imperial)=1616, Case Code (Metric)=4040, Current Rating=4.5A, DC Resistance (DCR)=27mR, Inductance=1uH, Inductance Tolerance=20%, Max Operating Temperature=125°C, Min Operating Temperature=-55°C, Package Quantity=4000, Saturation Current=5A, Self Resonant Frequency=64MHz, Test Frequency=100kHz, Case/Package=1616, Contact Plating=Tin, Core Material=Ferrite, Depth=4.31mm, Height=2mm, Height - Seated (Max)=0.079inch, Lead Free="Lead Free", Length=4.7mm, Max DC Current=4.5A, Military Standard=Not, Mount="Surface Mount", Number of Pins=1616, Packaging="Tape and Reel", Radiation Hardening=No, RMS Current (Irms)=4.5A, Shielding=Shielded, Termination=SMD/SMT, Tolerance=20%, Width=0.16inch
R28 R30 R77 R78: library part CMP-2002-04569-1, Manufacturer="KOA Speer", Part Number=RK73Z1ETTP
R76 R79 R80 R81: library part CMP-2002-08136-3, "RES Thick Film, 10kΩ, 5%, 0.063W, 200ppm/°C, 0402", Case Code (Imperial)=0402, Case Code (Metric)=1005, Max Operating Temperature=155°C, Max Power Dissipation=63mW, Min Operating Temperature=-55°C, Package Quantity=1, Resistance=10kR, Temperature Coefficient=200ppm/°C, Tolerance=5%, Voltage Rating=50V, Case/Package=0402, Composition="Thick Film", Contact Plating=Tin, Depth=0.5mm, Features="Automotive AEC-Q200", Height=0.016inch, Length=1mm, Military Standard=Not, Mount="Surface Mount", Number of Terminations=2, Packaging="Tape and Reel", Power Rating=63mW, Radiation Hardening=No, Termination=SMD/SMT, Weight=2.3E-05oz, Width=0.5mm
U1: library part CMP-1679-00009-1, "I2C CMOS Serial EEPROM, 32 Kb, 1.7 to 5.5 V, -40 to 85 degC, 8-Pin SOIC (751BD), RoHS, Tape and Reel", Case\Package=TO-226-3, Frequency="300 MHz", Max Operating Temperature="150 degC", Max Power Dissipation="625 mW", Min Operating Temperature="-55 degC", Package Quantity=1000, ComponentLink1Description="Manufacturer URL", ComponentLink1URL=http://www.onsemi.com/, ComponentLink2Description=Datasheet, ComponentLink2URL=http://www.onsemi.com/pub_link/Collateral/CAT24C32-D.PDF, ComponentLink3Description="Package Specification", ComponentLink3URL=http://www.onsemi.com/pub_link/Collateral/751BD.PDF, DatasheetVersion="Rev. 24, 06/2015", Elements=1, Height="5.33 mm", hFE Min=100, Length="5.2 mm", Mount="Through Hole", PackageDescription="8-Pin Small Outline Integrated Circuit, Body 4.9 x 3.9 mm, Pitch 1.27 mm", PackageReference=SOIC-8-751BD-01, Packaging=Bulk, Pins=3, Radiation Hardening=No, REACH SVHC="No SVHC", RoHSCompliant=true, Vce Max="1 V", Weight="0.006314 oz", Width="4.19 mm"
U2: library part CMP-10103-000005-1, "USB Switch IC 1 Channel 10-HVSON (3x3)", RoHS Compliant=Yes
U3: library part CMP-57379-000007-1, "DC DC CONVERTER 0.6-18V", Case/Package=QFN, Max Input Voltage=18V, Max Operating Temperature=125°C, Max Output current=3A, Min Input Voltage=4.5V, Min Operating Temperature=-40°C, Features=UVLO, Mount="Surface Mount", Number of Outputs=1, Packaging="Tape and Reel", Voltage - Output 1=18V
U4: "No Description Available", Mfr_Name=Epson, Copyright="Copyright (C) 2024 Ultra Librarian. All rights reserved.", Manufacturer_Part_Number="TG5032CGN 40.0000M-CAGHNA0", RefDes=RefDes, Type=DEV
U6: library part CMP-0378-00041-1, "16 Mbit SPI Serial Flash, 2.7 to 3.6 V, 50 MHz, 0 to 70 degC, 8-pin SOIC (S2A8), Tube", Manufacturer=Microchip, ComponentLink1Description="Manufacturer URL", ComponentLink1URL=http://www.microchip.com, ComponentLink2Description=Datasheet, ComponentLink2URL=http://ww1.microchip.com/downloads/en/DeviceDoc/25044A.pdf, ComponentLink3Description="Package Specification", ComponentLink3URL=http://ww1.microchip.com/downloads/en/DeviceDoc/25051A.pdf, ComponentLink4Description="Product URL", ComponentLink4URL=http://www.microchip.com/SST25VF016B, DatasheetVersion="Rev. A", Mounting Technology="Surface Mount", PackageDescription="8-Lead Plastic Small Outline Intergrated Circuit, 5.275 x 5.275 mm Body, 1.27 mm Pitch", PackageReference=SOIC-S2A8, PackageVersion="Rev. A", PartNumber=SST25VF016B-50-4C-S2AF
U12 U14: library part CMP-0326-00027-3, "ESD Solution for Super-Speed (6 GBPS) USB 3.0 Interface, 4 Channels, -40 to +85 degC, 10-pin SON (DQA), Green (RoHS & no Sb/Br)", Breakdown Voltage(Min)(V)=8, Differential Capacitance(pF)=0.05, IO Capacitance(Typ)(pF)=0.8, IO Leakage Current(nA)=10, Manufacturer="Texas Instruments", 1394 / Firewire=TRUE, ComponentLink1Description="Manufacturer URL", ComponentLink1URL=http://www.ti.com/, ComponentLink2Description=Datasheet, ComponentLink2URL=http://www.ti.com/general/docs/lit/getliterature.tsp?genericPartNumber=TPD4EUSB30&fileType=pdf, ComponentLink3Description="URL Link1", ComponentLink3URL=SamplesURL:http://www.ti.com/product/tpd4eusb30#samples, DatasheetVersion=SLVSAC2C, Eco-Plan="Green (RoHS & no Sb/Br)", HDMI=TRUE, IEC 61000-4-2 Air-Gap(+/- kV)=8, IEC 61000-4-2 Contact(+/- kV)=8, Mounting Technology="Surface Mount", PackageDescription="10-Pin Plastic Small Outline No-Lead, 1 x 2.5 x 0.55 mm Body, 0.5 mm Pitch", PackageReference=DQA0010A, PackageVersion="revB, Sep-2009", PartNumber=TPD4EUSB30DQAR, Serial ATA / eSATA=TRUE, SubFamily="ESD Solution", USB Full Speed=TRUE, USB High Speed=TRUE, USB Super Speed=TRUE
X1: library part XTAL_SIT5501AI-WUG33JT-10.000000, "1 MHz  60 MHz, Elite X Stratum 3E Precision Oscillator", Manufacturer_Name=SiTime, Datasheet Link=https://www.sitime.com/support/resource-library/datasheets/sit5501-datasheet, Geometry.Height=2.2mm, Manufacturer_Part_Number=SIT5501AI-WUG33JT-10.000000
Y1: library part CMP-2000-05733-2, "CRYSTAL 25.0000MHZ 18PF SMD", Frequency=25MHz, Load Capacitance=18pF, Manufacturer=Abracon, Package=ABM8G, Temperature="-40°C to +85°C", Temperature Range High=+85°C, Temperature Range Low=-40°C, Tolerance=20ppm, Automotive=No, Category=Crys, ComponentLink2Description=Datasheet, ComponentLink2URL=https://abracon.com/Resonators/ABM8G.pdf, Device Class L1="Passive Components", Device Class L2="Crystals / Oscillators", Device Class L3=Crystals, Digikey Description="CRYSTAL 25.0000MHZ 18PF SMD", ESR=60Ω, Height=1mm, Lead Free=Yes, Manufacturer Part Number=ABM8G-25.000MHZ-18-D2Y-T, Mouser Description="Crystals 25.000MHz 18pF 30ppm -40C +85C", Octopart=https://octopart.com/abm8g-25.000mhz-18-d2y-t-abracon-12676602, RoHS=TRUE, Series=ABM8G, Stability=30ppm

## Free pads (board coordinates)
  round 157.48 hole 98.43: 2(-142.64,-1902.97) 2(-142.64,-3832.1) 2(2140.83,-3832.1) 2(2140.83,-1902.97)
  round 255.91 hole 165.35: 2(2108.47,-2442.64)
  round 30 smd far side: 3(68.75,-3696.41) 3(118.58,-3695.93)

## Via types
v1: diameter 16, hole 10, L01-TOP to L04-BOT, tented both sides, 392 vias
v2: diameter 16, hole 10, L01-TOP to L04-BOT, 2 vias

## Nets (pads, with @x,y where several pads share a name; then routed paths per layer and width w, separated by ;. In a path a pad name is that pad's centre, name@x,y a point inside that pad or via, vN(x,y) a via of type N, cw(c..) or ccw(c..) an arc to the next point about the centre after c; other vN are vias at no path point)
40PIN_ID_SCL: U1.6 | length 2238.6
  L01-TOP w6: U1.6@143.3,-2135.24 v1(193.08,-2135.24) ; v1(739.99,-2675.04) 1017.49,-2675.04 1072.97,-2730.52 1244.93,-2730.52 1248.44,-2727.01 1248.44,-2142.34 v1(1270.66,-2120.12)
  L04-BOT w6: 160.03,-2135.24 v1(193.08,-2135.24) 226.62,-2168.78 226.62,-2323.55 232.38,-2329.31 232.38,-2512.32 238.88,-2518.82 291.03,-2518.82 427.58,-2655.36 720.31,-2655.36 v1(739.99,-2675.04) ; v1(1270.66,-2120.12) 1270.66,-2117.42 1277.27,-2110.8 1277.27,-2094.16 1284.11,-2087.32
40PIN_ID_SDA: U1.5 | length 2263.9
  L01-TOP w6: U1.5@143.3,-2185.24 v1(197.72,-2185.24) ; v1(707.27,-2693.38) 990.9,-2693.38 1041.14,-2743.63 1258.88,-2743.63 1262.39,-2740.11 1262.39,-2221.19 1349.09,-2134.49 v1(1349.09,-2117.42)
  L04-BOT w6: 160.03,-2185.24 v1(197.72,-2185.24) 197.72,-2371 220.04,-2393.32 220.04,-2519.16 235.79,-2534.9 275.87,-2534.9 416.87,-2675.9 692.75,-2675.9 696.99,-2680.15 696.99,-2680.39 707.27,-2690.68 v1(707.27,-2693.38) ; v1(1349.09,-2117.42) 1349.09,-2085.97
40PIN_RXD: J2.64 | length 162.6
  L01-TOP w6: J2.64@606.5,-2186.73 703.09,-2186.73 v1(706.77,-2190.41)
  L04-BOT w6: v1(706.77,-2190.41) 719.77,-2203.41 762.19,-2203.41
40PIN_SCL: J2.40 | length 180.1
  L01-TOP w6: J2.40@606.5,-2422.95 660.78,-2422.95 686.37,-2448.54 v1(702.15,-2448.54)
  L04-BOT w6: v1(702.15,-2448.54) 735.73,-2448.54 736.6,-2447.67 736.6,-2484.08 734.74,-2485.94
40PIN_SDA: J2.42 | length 273.4
  L01-TOP w6: J2.42@606.5,-2403.27 793.94,-2403.27 799.84,-2409.17 v1(802.55,-2409.17)
  L04-BOT w6: v1(802.55,-2409.17) 838.08,-2409.17 838.08,-2441.82 842.84,-2446.57
40PIN_TXD: J2.62 | length 178
  L01-TOP w6: J2.62@606.5,-2206.42 681.38,-2206.42 685.68,-2210.72 v1(685.68,-2241.27)
  L04-BOT w6: v1(685.68,-2241.27) 688.39,-2241.27 694.79,-2247.67 749.51,-2247.67
CON_PCIE_CLKREQ_N: J1.15 | length 1454.5
  L01-TOP w5: J1.15@191.52,-2993.97 276.89,-2993.97 316.2,-2954.66 316.2,-2931.38 355.16,-2892.42 526.68,-2892.42 545.31,-2873.8 559.45,-2873.8 559.95,-2873.3 660.93,-2873.3 691.11,-2843.12 788.21,-2843.12 859.95,-2771.38 1014.4,-2771.38 1024.81,-2781.79 1269.91,-2781.79 1341.29,-2710.4 1341.29,-2648.94 v1(1318.05,-2625.71)
  L04-BOT w6: 1281.16,-2584.37 1281.16,-2612.91 1293.96,-2625.71 v1(1318.05,-2625.71)
CON_PCIE_DET_WAKE: J1.14 | length 1169.5
  L01-TOP w5: J1.14@191.52,-2974.28 271.63,-2974.28 297.59,-2948.31 297.59,-2935.85 351.02,-2882.42 522.54,-2882.42 541.67,-2863.3 649.67,-2863.3 682.39,-2830.58 772.64,-2830.58 851.53,-2751.69 1023.57,-2751.69 1036.39,-2764.52 v1(1151.94,-2764.52)
  L04-BOT w5: v1(1151.94,-2764.52) 1151.94,-2710.84 1154.4,-2708.38
  L04-BOT w6: 1154.4,-2708.38 1154.4,-2665.2 1158.33,-2665.2
CON_PCIE_PWR_EN: J1.13 | length 651.6
  L01-TOP w5: J1.13@191.52,-2954.6 191.64,-2954.48 232.27,-2954.48 v1(232.38,-2954.37)
  L04-BOT w6: v1(232.38,-2954.37) 232.38,-2957.08 221.8,-2967.66 221.8,-3039.25 313.6,-3131.05 313.6,-3240.16 366.68,-3293.24 366.68,-3364.82 406.38,-3404.52 431.75,-3404.52 425.84,-3410.42 425.84,-3456.34
CON_PCIE_RST_B: J1.16 | length 1285.9
  L01-TOP w5: J1.16@191.52,-3013.65 271.35,-3013.65 326.2,-2958.8 326.2,-2935.52 359.3,-2902.42 530.83,-2902.42 549.45,-2883.8 673.72,-2883.8 694.75,-2862.77 790.12,-2862.77 857.22,-2795.67 1297.13,-2795.67 1299.86,-2792.94 v1(1299.86,-2776.94)
  L04-BOT w5: 1281.16,-2732.01 1281.16,-2764.82 1284.7,-2768.36 1288.3,-2768.36 1296.88,-2776.94 v1(1299.86,-2776.94)
GND: C10.2 C11.1 C12.2 C177.2 C187.2 D1.1 D2.1 D3.1 J1.3 J1.6 J1.9 J1.12 J1.MP1 J1.MP2 J2.3 J2.5 J2.11 J2.27 J2.33 J2.39 J2.45 J2.51 J2.57 J2.71 J2.73 J2.76 J2.77 J3.6 J3.9 J3.14 J3.20 J3.25 J3.30 J3.34 J3.39 J4.2 J4.3 J4.4 J4.5 J5.2 J5.3 J5.4 J5.5 J6.2 J6.3 J6.4 J6.5 J7.2 J7.3 J7.4 J7.5 J10.S1 J10.S2 pad.2 R80.1 R81.1 U1.4 U2.5 U2.11 U3.3 U3.12 U3.13 U3.14 U4.4 U5.PAD U6.4 U12.3@1300.85,-3361.28 U12.8@1267.97,-3361.28 U14.3@1300.85,-3230.42 U14.8@1267.97,-3230.42 X1.5 Y1.2 Y1.4 | length 1318.5
  L01-TOP w6: v1(429.76,-3520.65) 429.76,-3517.94 436.67,-3511.04 U3.3@436.67,-3477.99 ; 611.18,-2952.22 613.28,-2950.12 v1(646.99,-2950.12) ; v1(961.68,-3913.13) U2.5@1002.83,-3913.13 ; 1817.81,-3857.1 1817.81,-3857.02 1826,-3848.83 1836.58,-3848.83 v1(1851.02,-3834.39)
  L01-TOP w7.27: v1(1186.84,-3781.94) 1188.17,-3780.61 1188.17,-3751.77 1189.5,-3750.44 ; Y1.4@1217.5,-3697.97 1258.23,-3698.01 1261.6,-3694.64 v1(1263.96,-3694.64) ; v1@1263.96,-3692.27 1267.39,-3688.85 1267.39,-3680.74 1273.99,-3674.14
  L01-TOP w10: J1.12@191.52,-2934.91 v1(223.82,-2934.91) ; J1.9@191.52,-2875.86 191.62,-2875.95 221.82,-2875.95 v1(221.91,-2876.05) ; J1.6@191.52,-2816.8 228.64,-2816.8 v1(232.86,-2821.02) ; J1.3@191.52,-2757.75 229.78,-2757.75 v1(233.87,-2753.66)
  L01-TOP w15: v1(-134.05,-2185.24) U1.4@-79.14,-2185.24 ; v1@1031.62,-3784.86 v1(1031.66,-3784.81) 1070.44,-3784.81 ; v1(1130.88,-3242.86) 1130.88,-3242.59 1134.14,-3239.33 1134.14,-3203.74 ; v1(1340.36,-3912.17) 1340.63,-3912.17 1343.3,-3909.5 1386.42,-3909.5 U6.4@1388.82,-3907.1 ; 1800.01,-3760.67 v1(1826.77,-3760.67)
  L01-TOP w18: v1(754.71,-3676.82) 772.53,-3694.64 812.58,-3694.64
  L01-TOP w30: v1(-212.81,-3669.1) D1.1@-166.25,-3669.1 ; v1(175.78,-2229.28) 179.95,-2233.45 179.95,-2264.72 D2.1@192.51,-2277.28 ; v1(1130.39,-2923.08) 1184.78,-2923.08
  L02-GND w10: v1(221.91,-2876.05) v1@222.08,-2876.05
  L04-BOT w6: 932.75,-2048.93 933.98,-2050.16 v1(970.67,-2050.16)
  L04-BOT w15: 1126.24,-3203.74 1126.24,-3237.95 1130.88,-3242.59 v1(1130.88,-3242.86) ; v1(1227.23,-3407.27) 1227.23,-3370.07 1236.02,-3361.28 U12.8@1267.97,-3361.28 ; v1(1235.19,-3240.46) 1244.86,-3230.79 1267.6,-3230.79 U14.8@1267.97,-3230.42 ; U12.3@1300.85,-3361.28 v1(1329.95,-3361.28) ; U14.3@1300.85,-3230.42 v1(1329.18,-3230.42)
  L04-BOT w18: 759.54,-3658.39 762.56,-3661.4 793.79,-3661.4 ; v1(996.55,-3492.92) 1029.03,-3492.92 ; v1(996.55,-3449.61) 1000.45,-3445.71 1025.23,-3445.71 1026.08,-3444.86 ; v1(996.55,-3406.3) 1003.58,-3399.27 1028.19,-3399.27 1029.03,-3398.43 ; v1(996.55,-3363) 1007.52,-3352.03 1028.19,-3352.03 1029.03,-3351.19 ; v1(996.55,-3319.69) 1011.45,-3304.78 1028.19,-3304.78 1029.03,-3303.94
  other v1: 430.48,-3949.38 619.42,-3949.38 778.14,-3949.38 857.38,-3949.38 952.09,-3949.38 1065.1,-3949.38 1188.07,-3949.38 1300.37,-3949.38 1481.08,-3948.15 1918.58,-3948.15 1390.51,-3946.83 1590.57,-3947.27 1694.78,-3946.83 1810.42,-3947.27 699.7,-3945.9 95.09,-3945.37 285.43,-3945.49 -142.64,-3943.54 -95.3,-3943.54 -42.21,-3943.54 -198.32,-3939.17 2006.57,-3939.17 2066.22,-3939.17 2133.44,-3939.17 2188.98,-3939.17 2239.85,-3926.25 -241.66,-3914.9 358.45,-3913.13 286.97,-3897.14 2247.41,-3882.89 -249.16,-3853.54 2247.35,-3832.1 -249.16,-3796.61 2247.41,-3780.95 -249.16,-3742.73 2247.41,-3737.95 286.05,-3713.02 374.51,-3713.02 -17.52,-3703.84 669.17,-3695.93 2247.41,-3695.86 -249.16,-3690.15 36.88,-3674.4 620.54,-3643.34 -249.16,-3641.33 224.39,-3633.4 413.49,-3633.4 656.94,-3607.38 266.41,-3602.56 175.78,-3600.17 228.64,-3599.58 140.84,-3598.21 -249.16,-3584.59 601.83,-3556.98 -249.16,-3536.9 1229.07,-3535.24 -252.94,-3493.29 823.32,-3492.92 866.63,-3492.92 909.93,-3492.92 953.24,-3492.92 684.32,-3482.94 624.42,-3464.21 823.32,-3449.61 866.63,-3449.61 909.93,-3449.61 953.24,-3449.61 -252.94,-3437.22 710.12,-3429.99 823.32,-3406.3 866.63,-3406.3 909.93,-3406.3 953.24,-3406.3 654.81,-3402.55 314.81,-3392.74 -252.94,-3373.41 633.5,-3370.63 823.32,-3363 866.63,-3363 909.93,-3363 953.24,-3363 314.81,-3362.1 823.32,-3319.69 866.63,-3319.69 909.93,-3319.69 953.24,-3319.69 326.57,-3318.71 -258.93,-3310.31 644.74,-3297.98 327.48,-3284.26 700.1,-3262.77 -249.16,-3251.22 342.89,-3228.47 -89.55,-3218.36 293.67,-3207.37 342.89,-3193.89 629.76,-3192.94 138.62,-3189.82 162.98,-3189.82 189.93,-3187.72 118.58,-3175.89 342.89,-3160.84 631.39,-3154.29 620.62,-3119.75 342.89,-3114.21 339.38,-3075.24 649.86,-3051.16 339.38,-3038.7 256.36,-2954.48 2247.41,-2939.33 291.83,-2905.74 2247.41,-2905.05 2247.41,-2854.33 261.26,-2830.58 2247.41,-2816.33 261.26,-2806.81 754.69,-2802.85 363.07,-2793.03 2247.41,-2771.38 362.81,-2767.44 756.78,-2761.52 2247.41,-2728.83 362.81,-2708.38 2247.41,-2689.07 2247.41,-2633.86 2247.41,-2569.53 -59.46,-2564.68 92.99,-2554.84 122.52,-2554.84 147.23,-2554.84 173.06,-2554.84 251.67,-2550.9 -77.14,-2524.93 2247.41,-2508.96 254.16,-2497.75 -252.94,-2479.53 259.06,-2432.79 -252.94,-2428.86 2247.41,-2401.57 -252.94,-2381.1 258.42,-2376.21 2247.41,-2357.62 -252.94,-2335.85 259.44,-2316.56 2247.41,-2308.5 -252.94,-2291.84 258.42,-2255.63 2247.41,-2249.64 -252.94,-2235.94 2247.41,-2201.06 -249.16,-2176.19 769.08,-2163.63 2247.41,-2155.07 -245.9,-2121.77 359.43,-2122.44 769.08,-2120.32 2247.41,-2098.15 359.43,-2088.3 769.08,-2078.46 -249.16,-2068.47 254.65,-2044.28 2247.41,-2040.08 98.86,-2022.28 255.28,-2022.28 -252.94,-2012.44 2247.41,-1990.16 -252.94,-1962.97 2247.41,-1948.29 -252.94,-1919.88 2247.41,-1895.45 -252.94,-1872.09 2247.41,-1831.39 -252.94,-1818.22 -221.38,-1779.87 -40.76,-1774.82 27.52,-1774.82 2219.57,-1774.86 -163.85,-1773.52 -103.75,-1773.52 91.59,-1773.52 140.99,-1768.32 210.72,-1768.32 275.29,-1768.32 342.2,-1768.32 425.45,-1768.32 503.44,-1768.32 584.61,-1768.32 648.72,-1768.32 713.18,-1768.32 773.7,-1768.32 835.84,-1768.32 901.98,-1768.32 972.91,-1768.32 1031.29,-1768.32 1093.81,-1768.32 1159.59,-1768.32 1235.29,-1768.32 1294.86,-1768.32 1356.63,-1768.36 1431.77,-1768.32 1503.62,-1768.36 1566.56,-1768.32 1658.98,-1768.36 1764.27,-1768.36 1864.36,-1768.36 1954.61,-1768.36 2018,-1768.36 2085.15,-1768.36 2157.48,-1768.36
  other v2: 941.99,-2979.39 1218.28,-2667.68
GPS_SEL: U2.9 | length 4494.4
  L01-TOP w6: U2.9@1118.97,-3854.07 1122.53,-3854.07 1124.85,-3856.39 1126.94,-3854.29 1147.54,-3854.29 v1(1147.76,-3854.52)
  L04-BOT w6: 842.28,-2035.16 884.53,-2035.16 898.3,-2048.93 899.29,-2048.93 898.07,-2050.16 898.07,-2098.72 898.07,-2173.76 1172.85,-2448.54 1717.69,-2448.54 2214.24,-2945.1 2214.24,-3589.12 2048.57,-3754.79 2048.57,-3813.59 1933.03,-3929.13 881.08,-3929.13 831.68,-3879.73 831.68,-3813.84 854.42,-3791.1 906.75,-3791.1 970.17,-3854.52 v1(1147.76,-3854.52)
I225_CLKREQ_N: U5.3 | length 247.4
  L01-TOP w7.27: U5.3@980.8,-3271.46 980.8,-3204.61 v1(1009.51,-3175.89)
  L04-BOT w7.27: v1(1009.51,-3175.89) 1009.51,-3145.44 1079.24,-3075.72 1079.24,-3075.63 1086.79,-3068.08 1086.87,-3068.08
I225_DISABLE_N: U5.2 | length 362.8
  L01-TOP w7.27: U5.2@996.55,-3271.46 996.55,-3229.21 v1(1029.03,-3196.73)
  L04-BOT w7.27: 931.23,-3051.16 982.72,-3051.16 982.72,-3099.24 952.7,-3129.26 952.7,-3177.63 971.79,-3196.73 v1(1029.03,-3196.73)
I225_JTAG_CLK: U5.29 | length 97.9
  L01-TOP w7.27: v1(788.45,-3571.36) 790.12,-3569.69 790.12,-3564.5 807.57,-3547.05 U5.29@807.57,-3541.15
  L04-BOT w6: v1(788.45,-3571.36) 793.79,-3571.36 793.79,-3625.8
I225_JTAG_RSTN: U5.16 | length 95
  L01-TOP w6: v1(723.4,-3299.02) 724.86,-3299.02 736.15,-3310.31 744.83,-3310.31 754.21,-3319.69 U5.16@775.09,-3319.69
  L04-BOT w6: v1(723.4,-3299.02) 723.4,-3301.73 730.27,-3308.6 730.27,-3330.91
I225_LAN_PWR_GOOD: U5.1 | length 194.6
  L01-TOP w7.27: U5.1@1012.3,-3271.46 1012.3,-3244.63 1019.56,-3237.36 v1(1019.56,-3235)
  L04-BOT w7.27: v1(1019.56,-3235) 1021.92,-3235 1033.88,-3223.05 1043.18,-3223.05 1052.66,-3213.57 1056.77,-3209.46 1056.77,-3149.79 1090.43,-3116.12 1090.43,-3116.04
I225_PE_RX_N: U5.27 | length 1456.2
  L01-TOP w5: v1@620.54,-3576.38 674.03,-3514.49 674.51,-3513.99 cw(c689,-3527.78) 674.81,-3513.68 cw(c723.97,-3562.75) 723.4,-3493.29 769.19,-3492.92 U5.27@775.09,-3492.92
  L04-BOT w5: 41.21,-2942.79 41.39,-2942.97 ; 110.19,-2868.92 ccw(c110.19,-2871.3) 108.51,-2869.62 101.86,-2876.26 101.86,-2876.55 cw(c94.79,-2869.48) 94.79,-2879.48 65.94,-2879.48 ccw(c65.94,-2894.34) 55.43,-2883.83 55.37,-2883.89 ccw(c89.55,-2918.07) 41.21,-2918.07 41.21,-2936.58 ccw(c156.08,-2936.58) 41.39,-2942.97 ; v1(616.54,-3579.66) ccw(c616.54,-3573.9) 620.62,-3577.98 v1@622.78,-3575.82 ; v1@622.79,-3575.81 ccw(c613.49,-3566.53) 626.63,-3566.53 626.63,-3552.85 ccw(c600.27,-3552.85) 618.91,-3534.22 ccw(c604.74,-3548.39) 604.74,-3528.35 ccw(c604.74,-3608.14) 548.32,-3551.72 517.64,-3582.4 cw(c473.31,-3538.06) 473.31,-3600.76 391.7,-3600.76 cw(c391.7,-3511.84) 328.83,-3574.72 288.36,-3534.25 cw(c316.18,-3506.42) 276.83,-3506.42 276.83,-3381.08 ccw(c270.25,-3381.08) 274.91,-3376.43 274.87,-3376.39 cw(c320.63,-3330.63) 255.91,-3330.63 255.91,-3142.9 ccw(c202.19,-3142.9) 240.18,-3104.91 170.48,-3035.22 ccw(c149.83,-3055.87) 149.83,-3026.66 136.29,-3026.66 cw(c136.29,-2961.58) 90.27,-3007.6 47.1,-2964.43 cw(c60.55,-2950.99) 43.51,-2959.42 cw(c60.55,-2950.99) 41.53,-2950.99 41.53,-2943.11 41.39,-2942.97
I225_PE_RX_P: U5.28 | length 1439.5
  L01-TOP w5: v1(631.39,-3594.51) 637.04,-3582.72 685.14,-3524.6 cw(c689,-3527.78) 685.49,-3524.22 cw(c723.97,-3562.75) 723.97,-3508.29 769.19,-3508.67 U5.28@775.09,-3508.67
  L04-BOT w5: 58.12,-2954.23 100.84,-2996.96 ccw(c136.35,-2961.45) 136.35,-3011.66 149.94,-3011.66 cw(c149.94,-3055.59) 181,-3024.53 250.82,-3094.35 cw(c202.32,-3142.85) 270.91,-3142.85 270.91,-3330.57 ccw(c320.76,-3330.57) 285.51,-3365.82 285.57,-3365.87 cw(c270.44,-3381) 291.83,-3381 291.83,-3506.37 ccw(c316.32,-3506.37) 299,-3523.68 339.39,-3564.06 ccw(c391.78,-3511.65) 391.78,-3585.76 473.22,-3585.76 ccw(c473.22,-3537.84) 507.1,-3571.73 537.73,-3541.09 cw(c604.71,-3608.07) 604.71,-3513.35 604.8,-3513.35 cw(c604.8,-3548.25) 629.48,-3523.57 629.6,-3523.69 cw(c600.55,-3552.74) 641.63,-3552.74 641.63,-3569.81 cw(c621.42,-3569.81) 635.71,-3584.1 ccw(c641.04,-3589.43) 633.5,-3589.43 cw(c626.31,-3589.43) v1(631.39,-3594.51) ; 58.11,-2954.22 cw(c61.94,-2950.41) 57.71,-2953.78 cw(c61.94,-2950.41) 56.53,-2950.41 56.53,-2948.17 56.86,-2947.85 cw(c156.21,-2936.52) 56.21,-2936.52 56.21,-2918.1 cw(c89.62,-2918.1) 66,-2894.48 95.07,-2894.48 cw(c95.07,-2902.63) 100.84,-2896.87 cw(c99.54,-2898.17) 101.38,-2898.17 108.03,-2904.82 ccw(c109.71,-2903.14) 109.71,-2905.51
I225_SCK: 
I225_SDA: 
I225_SDP0:  | length 1601.7
  L01-TOP w6: v1(692.34,-2896.66) 695.16,-2898.36 700.1,-2903.3 cw(c692.6,-2910.8) 703.21,-2910.8 703.21,-2950.12 ; 1204.26,-3875.97 v1(1204.26,-3840.63) 1204.26,-3821.91 1321.65,-3704.52 1321.65,-3618.26 1315.42,-3612.03 1315.42,-3596.48 v1(1313.98,-3595.03)
  L04-BOT w6: v1(692.34,-2896.66) 715.2,-2873.8 951.18,-2873.8 1048.06,-2970.68 1141.17,-2970.68 1205.79,-3035.3 1205.79,-3500.35 1214.11,-3508.67 1242.57,-3508.67 1312.07,-3578.17 1312.07,-3593.12 v1(1313.98,-3595.03)
I225_SDP1: D3.3 | length 183.6
  L01-TOP w6: 720.42,-3765.17 720.42,-3804.62 ccw(c750.85,-3804.62) D3.3@729.33,-3826.14 766.62,-3788.85 766.62,-3776.65 v1(768.54,-3774.73)
  L04-BOT w6: 716.48,-3775.01 717.24,-3774.25 768.06,-3774.25 v1(768.54,-3774.73)
I225_SDP2: D1.3 | length 167.8
  L01-TOP w6: v1(-37.2,-3607.38) -39.23,-3607.38 cw(c-39.23,-3522.39) D1.3@-99.32,-3582.49 cw(c-72.45,-3609.36) -72.45,-3571.36 -37.2,-3571.36
  L04-BOT w6: v1(-37.2,-3607.38) -37.2,-3583.22 -30.35,-3576.38 -30.26,-3576.38
I225_SDP3: D1.2 | length 234.6
  L01-TOP w6: v1(-48.98,-3702.28) -66.15,-3702.28 -72.44,-3695.99 D1.2@-99.32,-3669.1 -89.55,-3659.33 cw(c-18.84,-3730.04) -18.84,-3630.04 25.18,-3630.04
  L04-BOT w6: v1(-48.98,-3702.28) -48.98,-3677.83 -42.14,-3670.99 -42.08,-3670.99
I225_SPI_CLK: U6.6 | length 1046.4
  L01-TOP w6: U6.6@1674.26,-3857.1 1737.77,-3857.1 ; v1(1737.77,-3834) 1737.77,-3857.1 ; 1782.21,-3857.1 1737.77,-3857.1
  L01-TOP w7.27: v1(904.05,-3725.5) 904.45,-3725.1 904.45,-3705.26 904.84,-3704.86
  L04-BOT w6: v1(904.05,-3725.5) 923.06,-3725.5 939.06,-3709.5 958.74,-3709.5 970.61,-3721.37 970.61,-3725.5 996.61,-3751.5 1204.07,-3751.5 1230.53,-3777.95 1569.29,-3777.95 1625.33,-3834 v1(1737.77,-3834)
I225_SPI_CS: U6.1 | length 427.1
  L01-TOP w6: v1(1324.4,-3757.1) U6.1@1388.82,-3757.1
  L01-TOP w7.27: 974.96,-3725.04 975.19,-3725.27 1003.01,-3725.27 v1(1003.24,-3725.5)
  L04-BOT w6: v1(1003.24,-3725.5) 1005.95,-3725.5 1013.61,-3733.17 1217.75,-3733.17 1241.68,-3757.1 v1(1324.4,-3757.1)